# Altium PCB FPGA Board V1.PcbDoc (part 1 of 3)
Units mil, origin at the board's own origin, x right, y up, seen from the top; angles counter-clockwise.
Board outline 3460 x 2420 mil, 8 copper layers (Layer 1, Layer 2, Layer 3, Layer 4, Layer 5, Layer 6, Layer 7, Layer 8), stack 40.159 mil thick; 81 components, 311 nets, 1100 pads, 152 vias.
Unrouted connection lines stored in the file: 594.
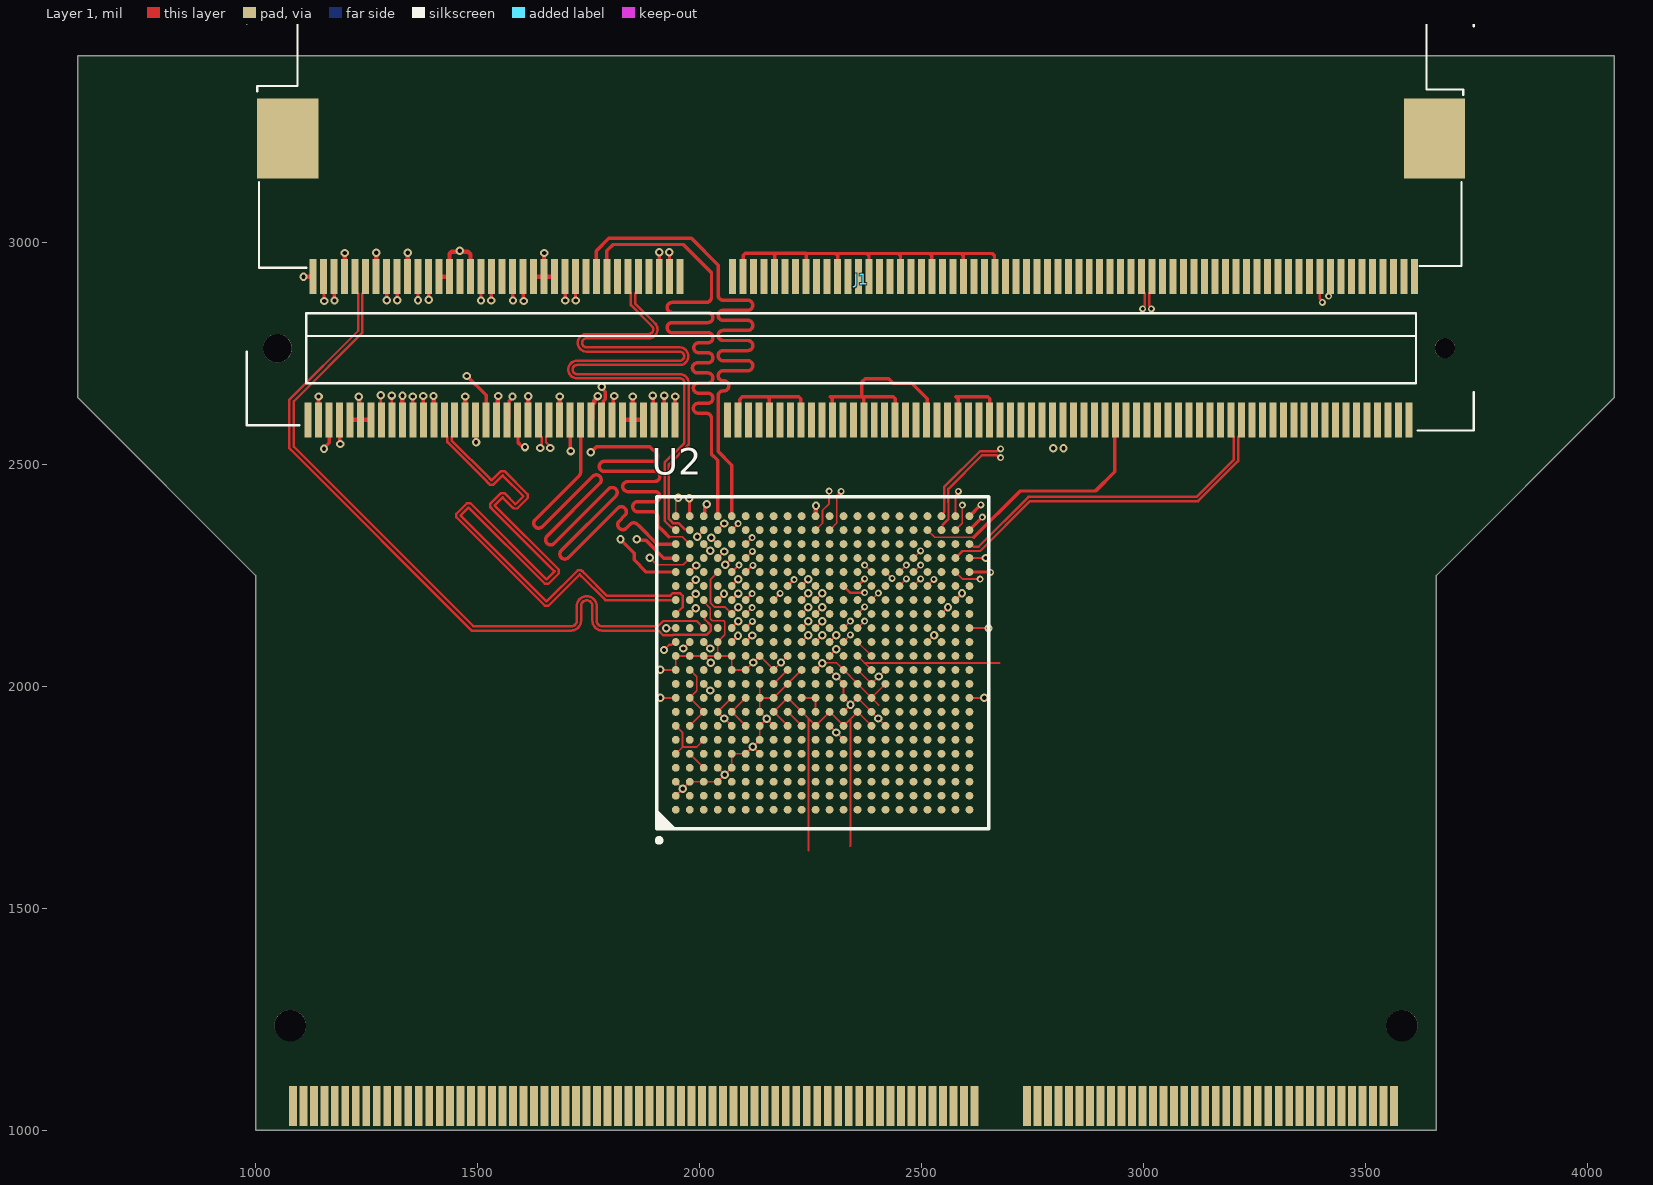
[diagram p0: Layer 1 view]
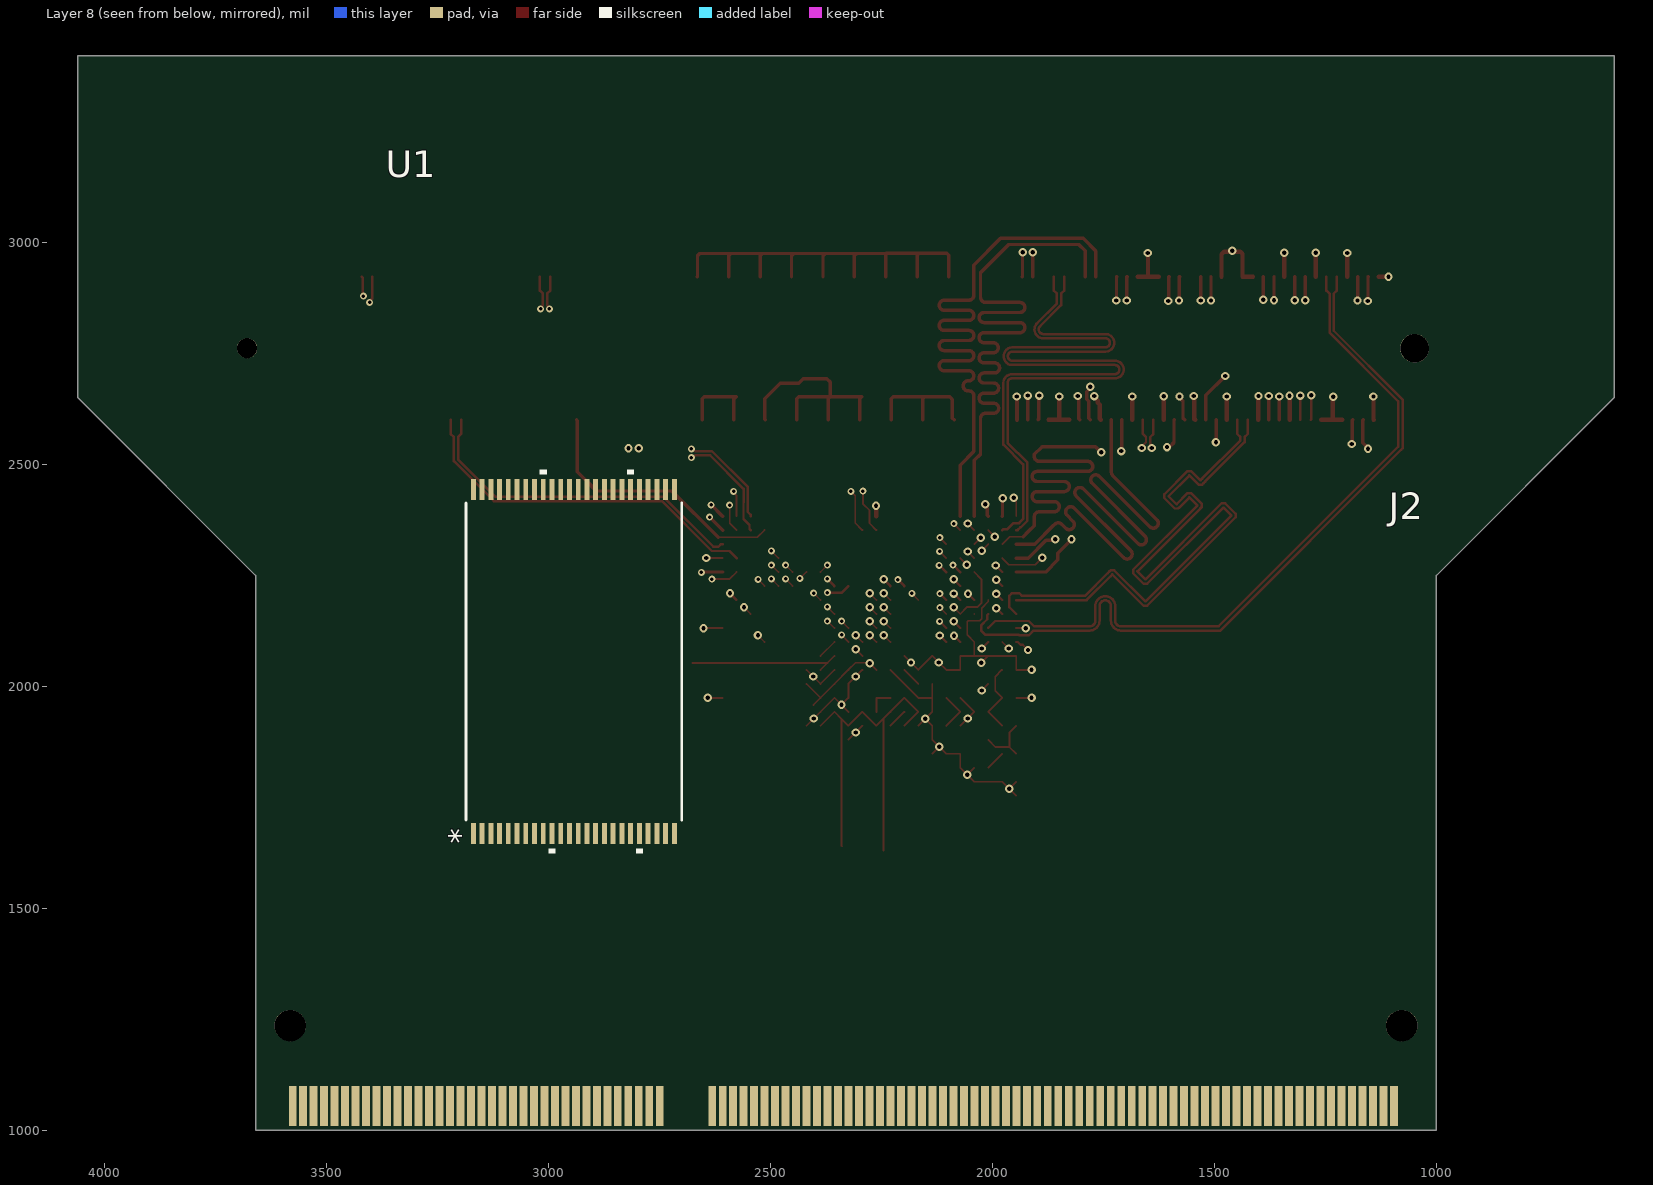
[diagram p1: Layer 8 view, seen from below]
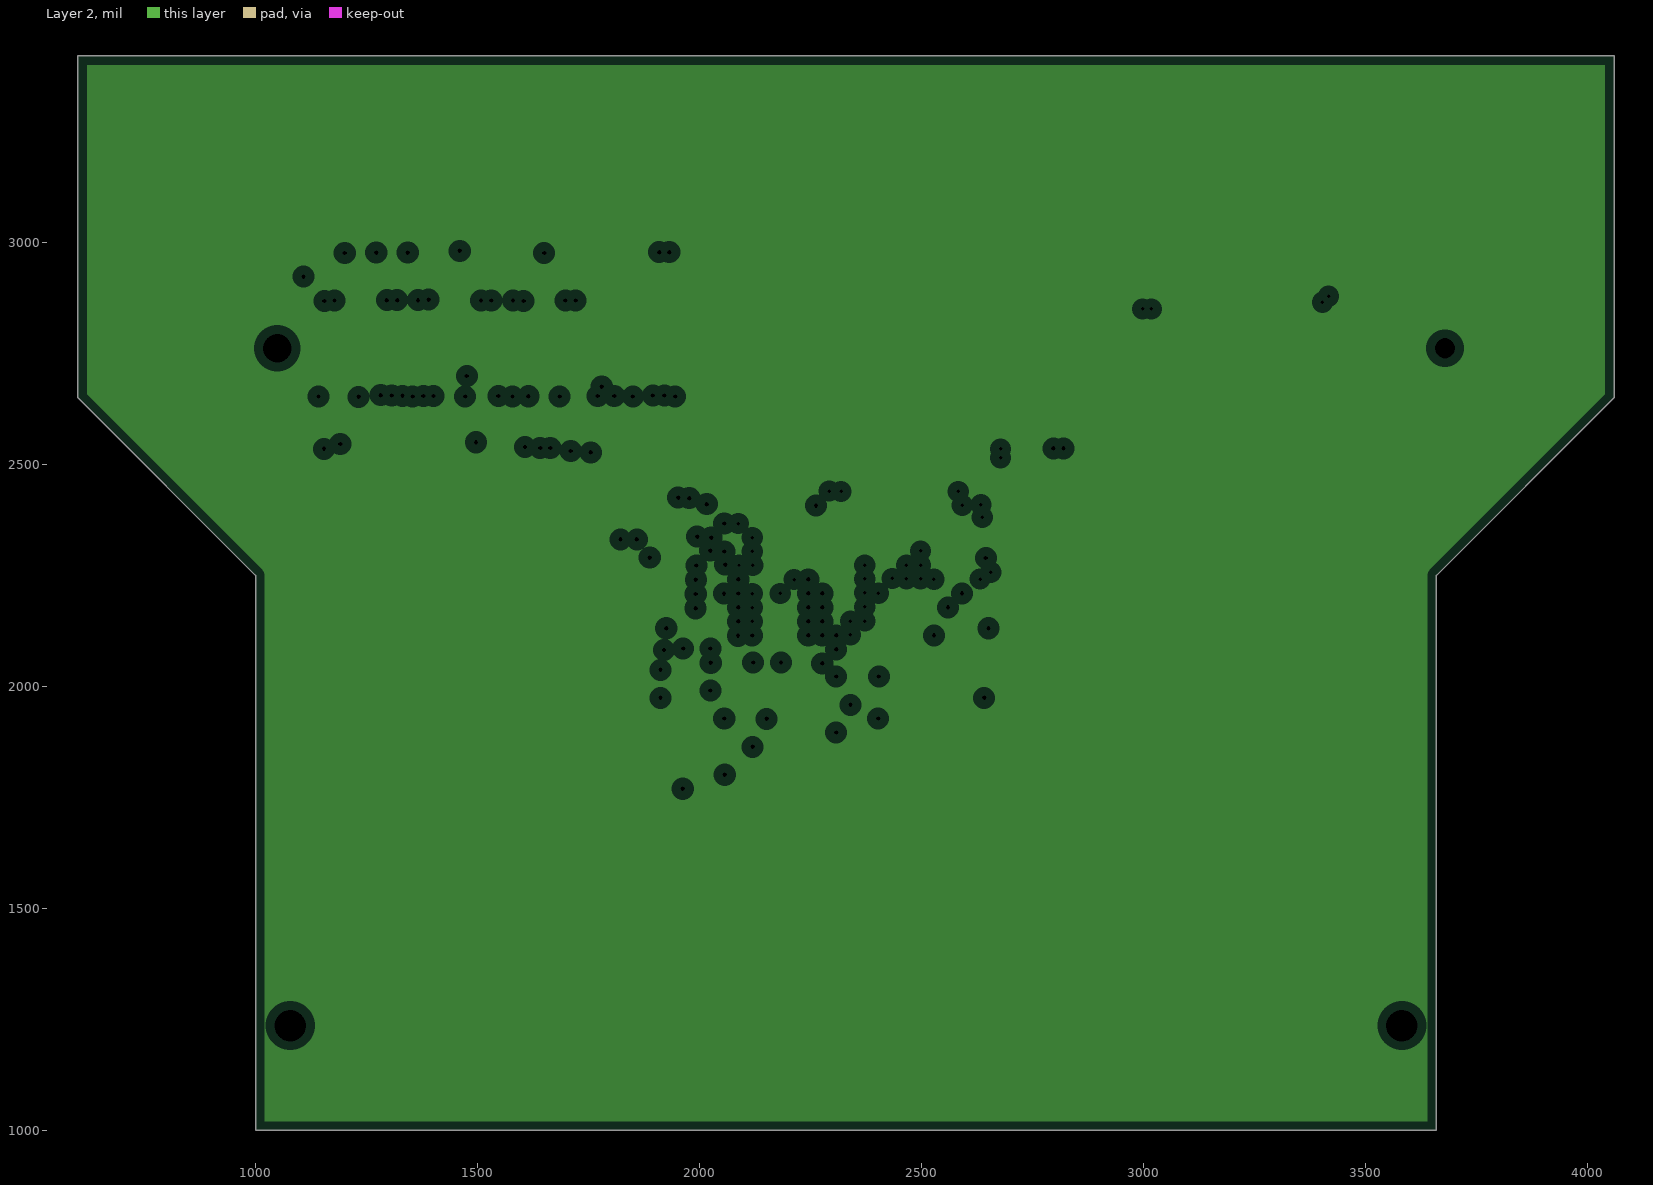
[diagram p2: Layer 2, clearances drawn from the general rule]
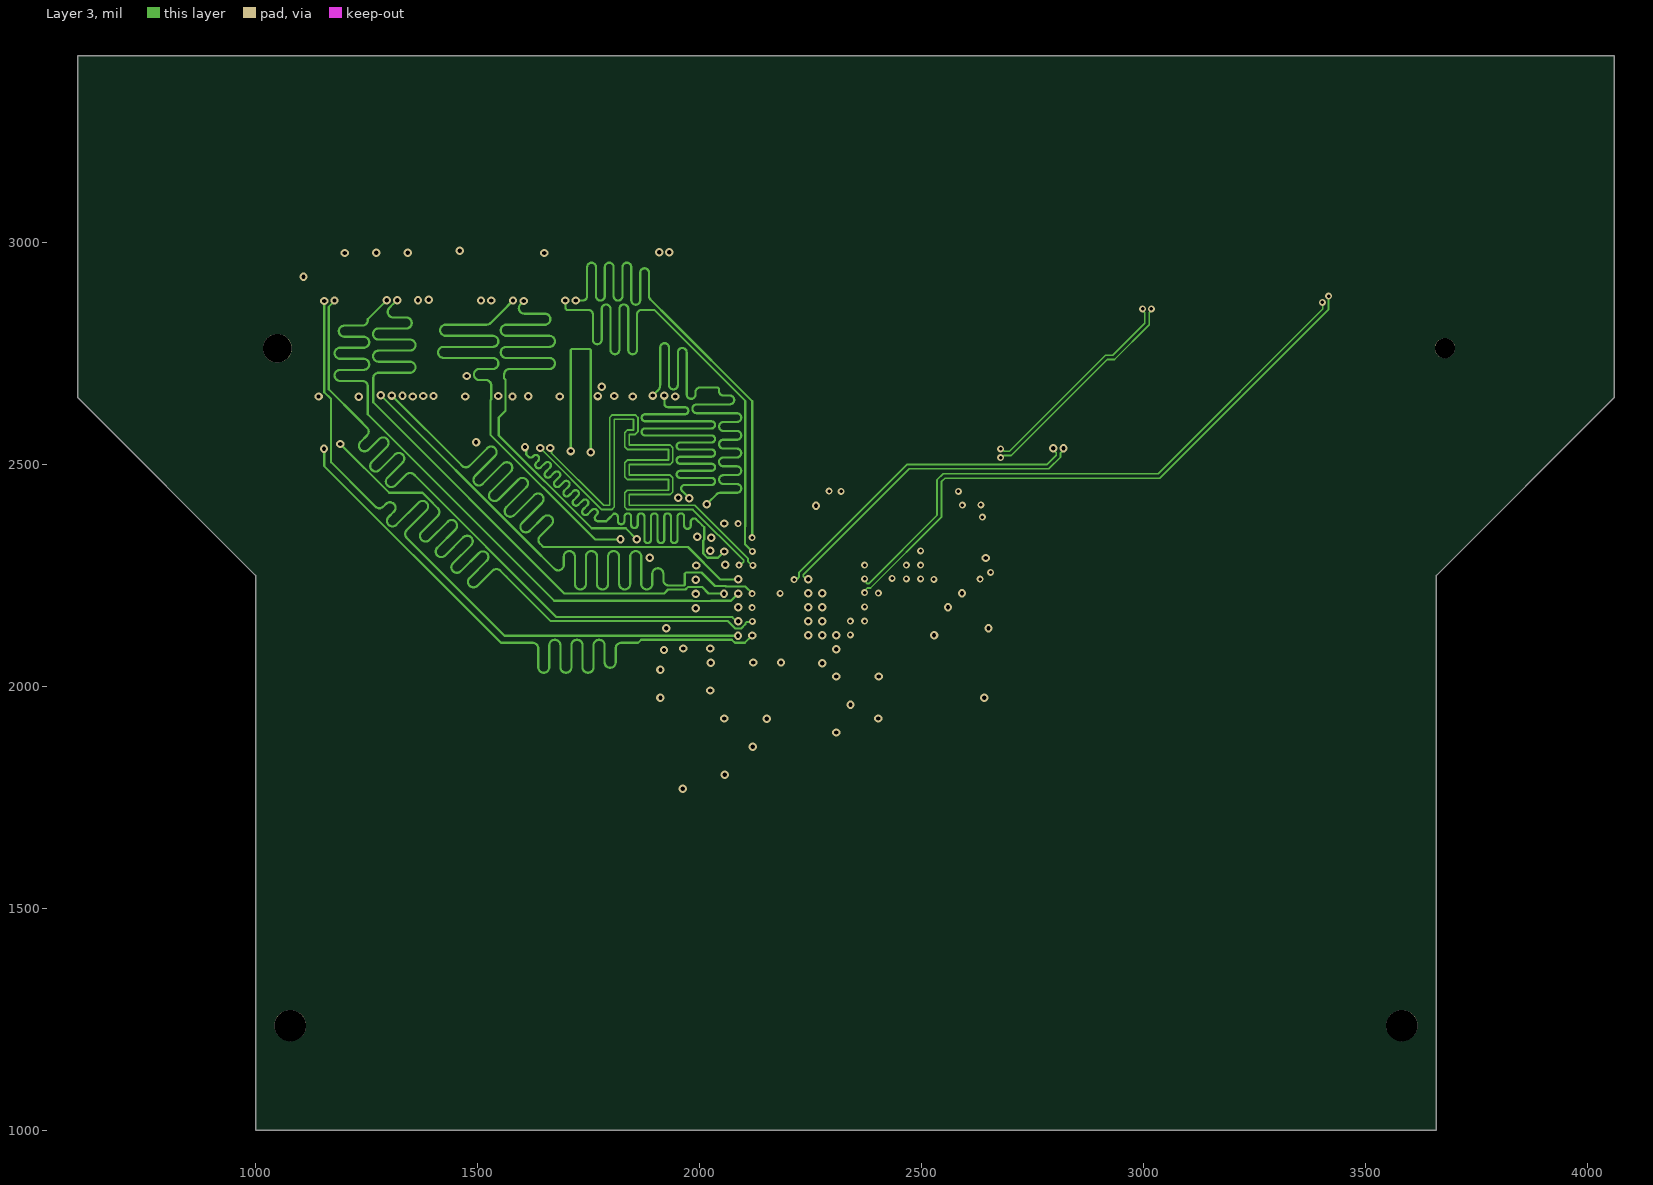
[diagram p3: Layer 3]
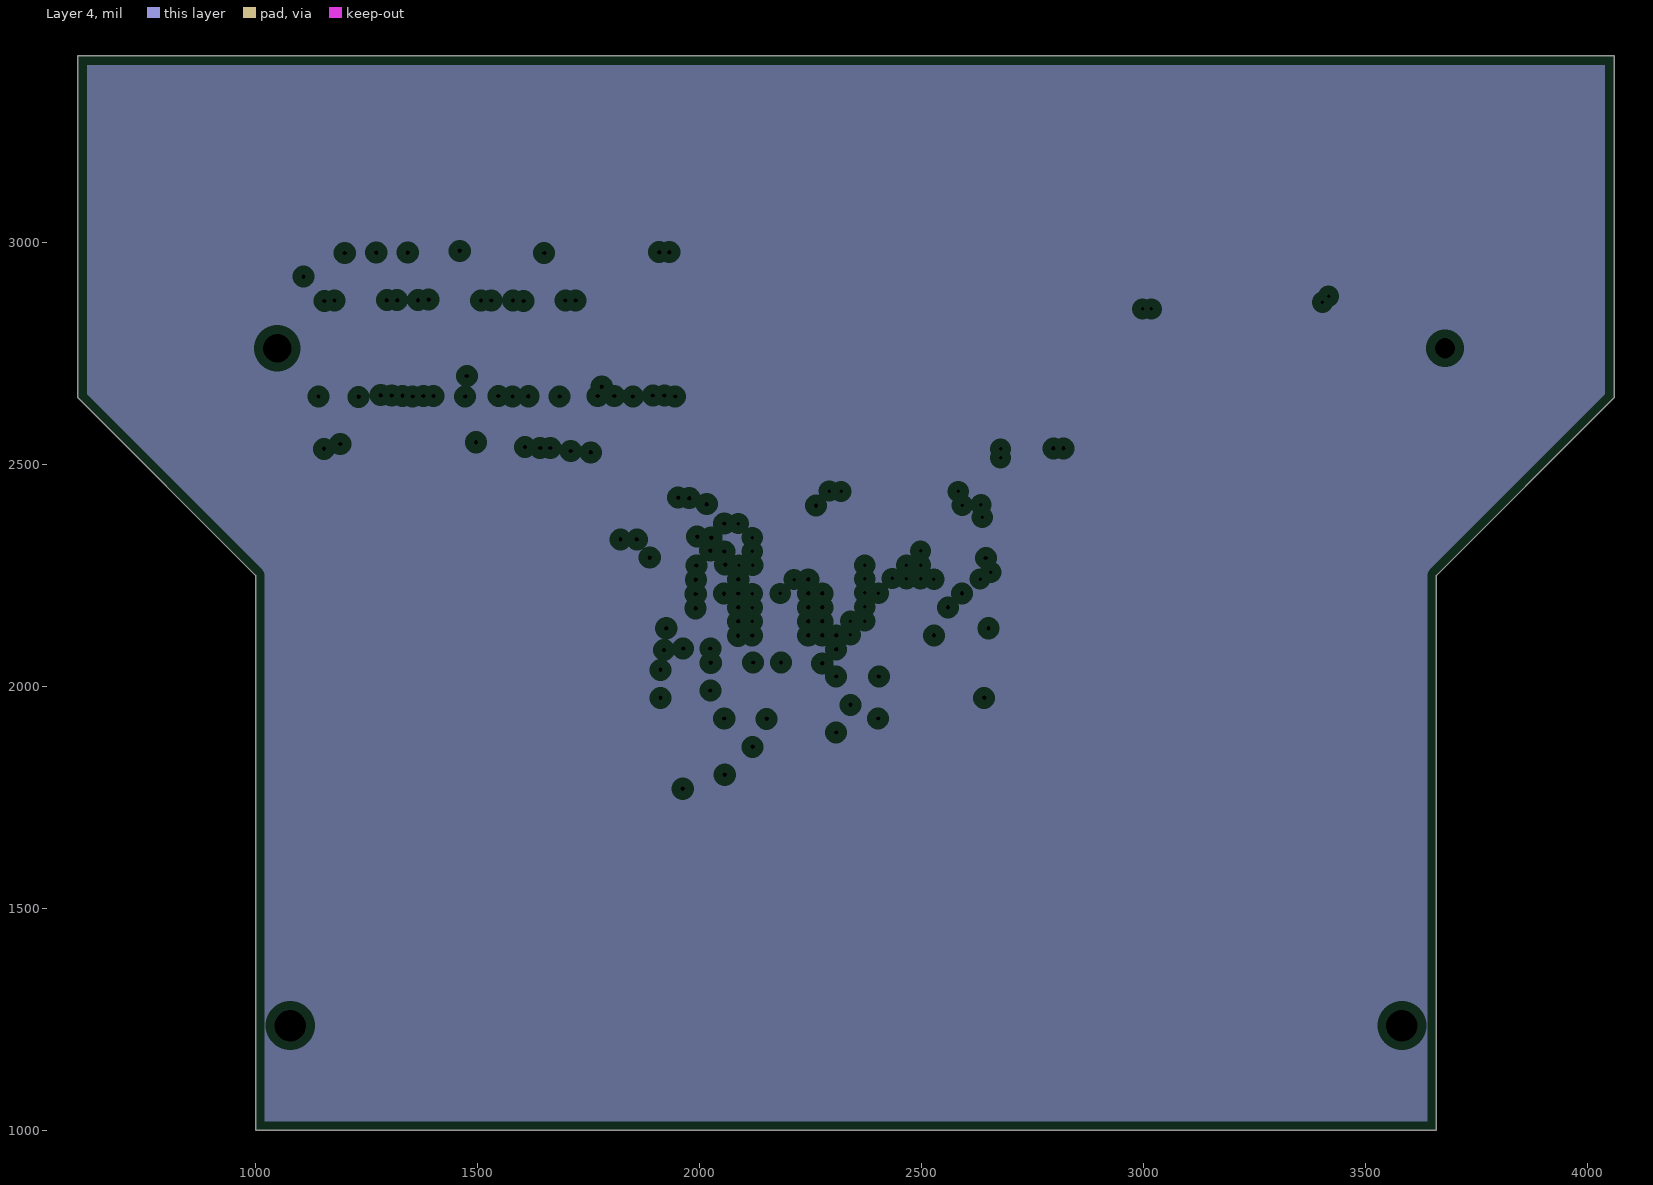
[diagram p4: Layer 4, clearances drawn from the general rule]
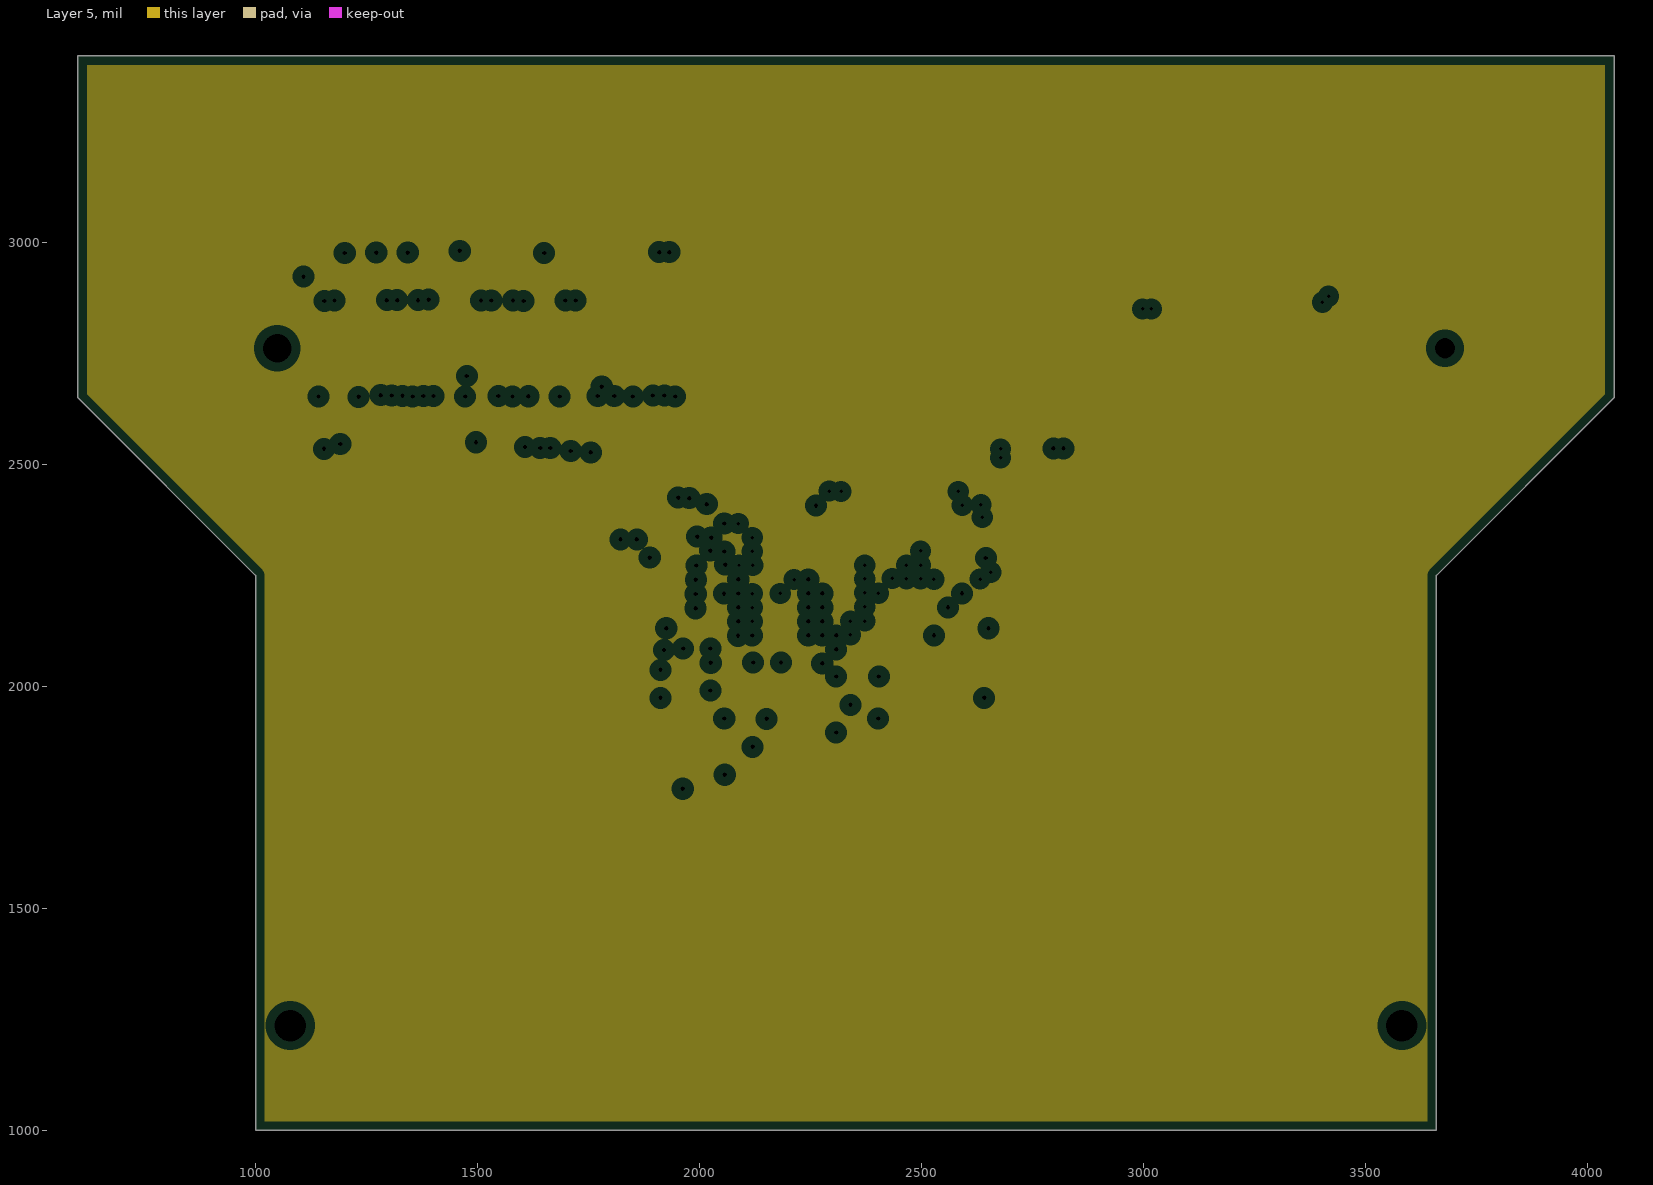
[diagram p5: Layer 5, clearances drawn from the general rule]
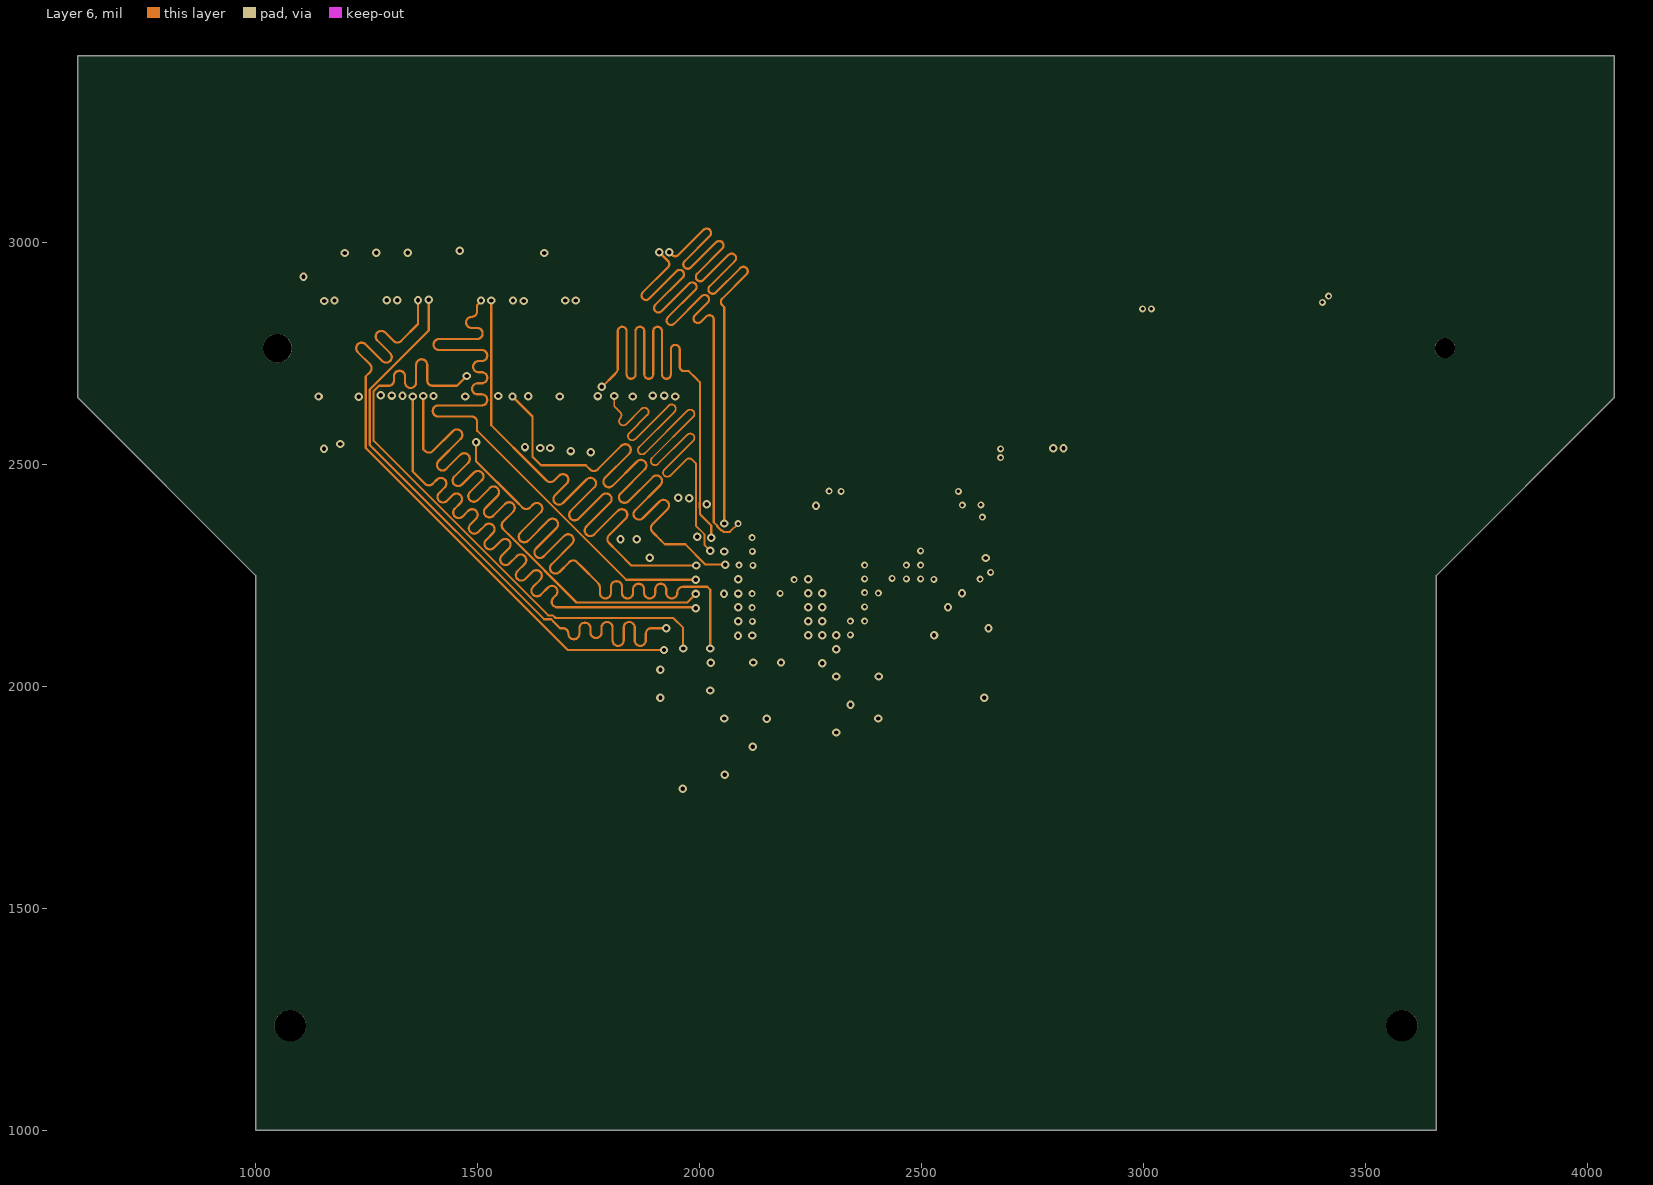
[diagram p6: Layer 6]
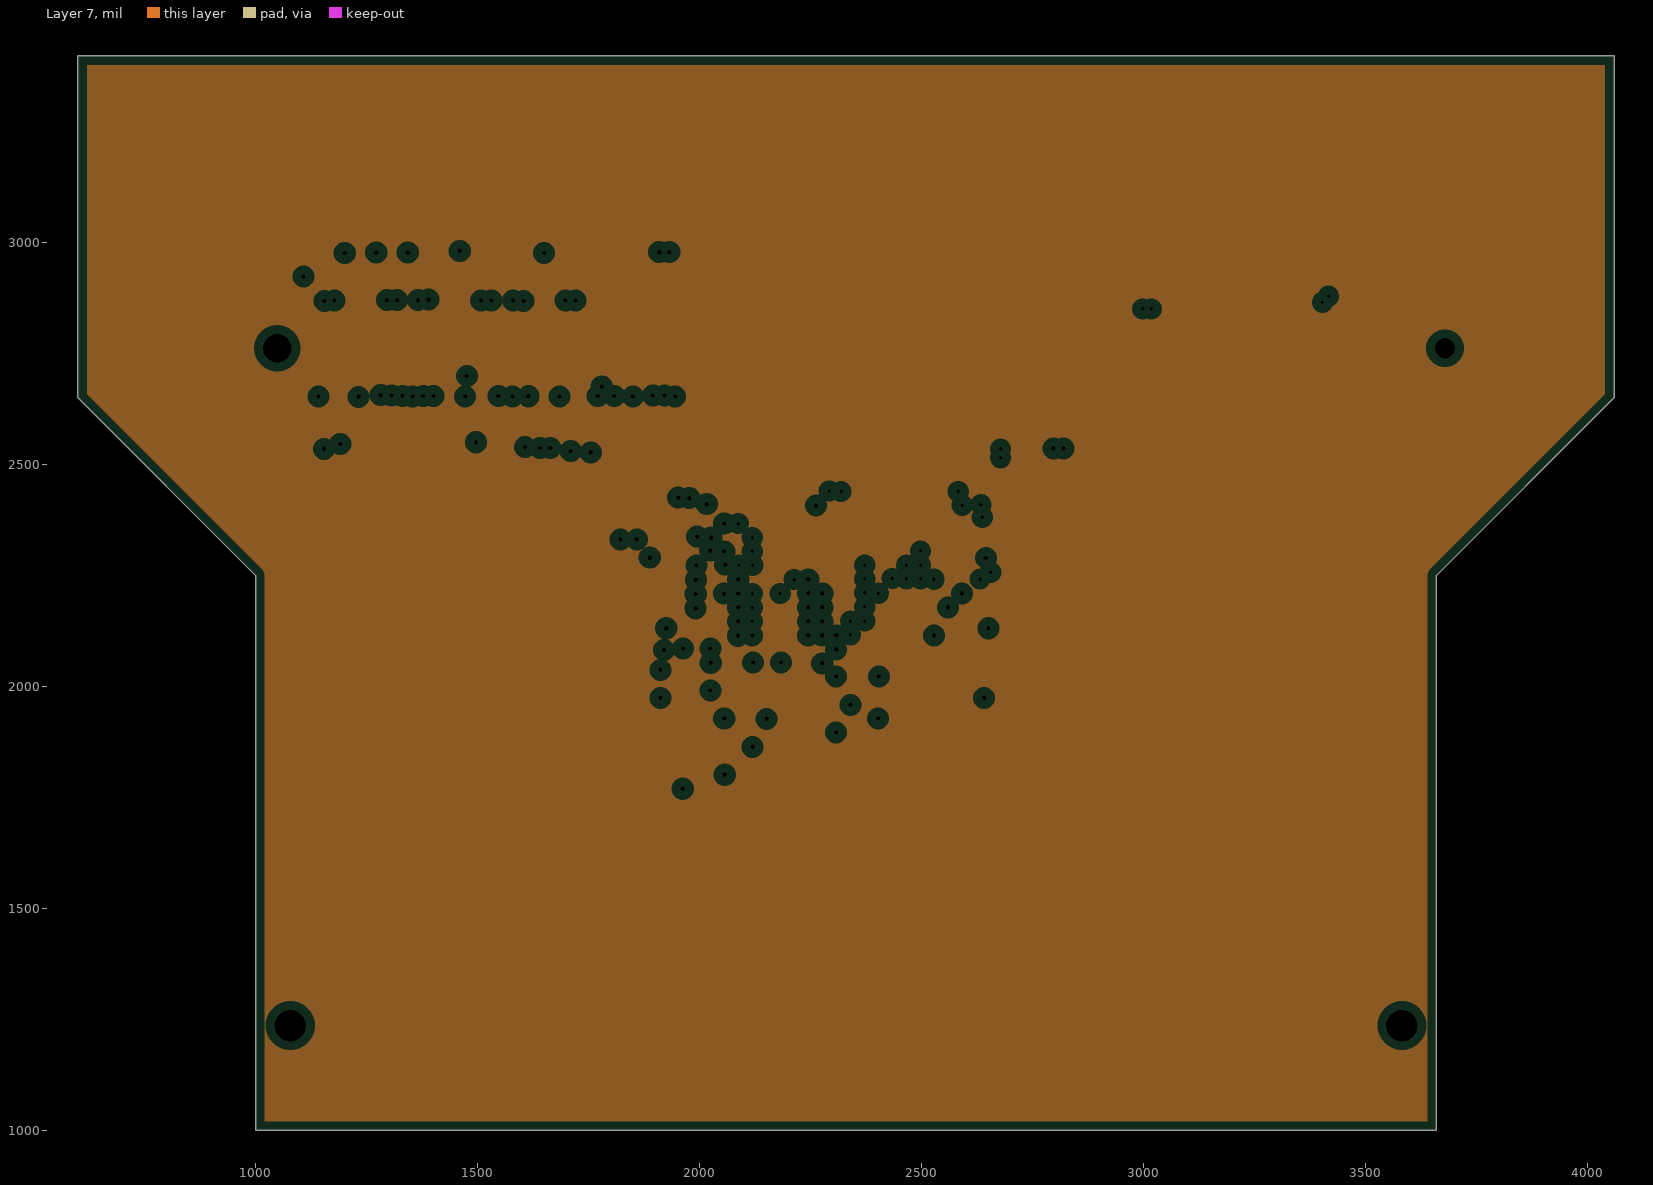
[diagram p7: Layer 7, clearances drawn from the general rule]

## Layer stack, top to bottom
Top Solder: solder mask 0.4, Solder Resist, Dk 3.5
Layer 1: signal copper 1.378
Dielectric 4: prepreg 3.15, PP-006, Dk 4.29
Layer 2: plane copper 1.378, net GND
Dielectric 2: core 3.937, FR-4, Dk 4.29
Layer 3: signal copper 1.378
Dielectric 6: prepreg 5.512, PP-006, Dk 4.29
Layer 4: plane copper 1.378
Dielectric 1: core 3.937, PP-006, Dk 4.29
Layer 5: plane copper 1.378
Dielectric 7: prepreg 5.512, PP-006, Dk 4.29
Layer 6: signal copper 1.378
Dielectric 3: core 3.937, FR-4, Dk 4.29
Layer 7: plane copper 1.378
Dielectric 5: prepreg 3.15, PP-006, Dk 4.29
Layer 8: signal copper 1.378
Bottom Solder: solder mask 0.4, Solder Resist, Dk 3.5

## Board outline
1000,2250 600,2650 600,3420 4060,3420 4060,2650 3660,2250 3660,1000 1000,1000

## Design rules (kind name [scope] priority, off if disabled: settings)
Clearance [All] p1: gap=4 ignorepadtopadclearanceinfootprint=FALSE
ComponentClearance [All] p1: gap=10 collisioncheckmode=3 verticalgap=10 showdistances=FALSE donotcheckwithout3dbody=TRUE
DiffPairsRouting CG [InDifferentialPair('CK0')] p1: maxlimit=5.9 minlimit=4 mostfreqgap=5.9 toplayer_maxgap=4 toplayer_prefgap=4 toplayer_minwidth=4 toplayer_maxwidth=5.54 toplayer_prefwidth=5.54 midlayer2_mingap=5.9 midlayer2_minwidth=4 midlayer2_maxwidth=4.01 midlayer2_prefwidth=4.01 midlayer3_mingap=5.9 midlayer3_minwidth=4 midlayer3_maxwidth=4.01 midlayer3_prefwidth=4.01 bottomlayer_maxgap=4 bottomlayer_prefgap=4 bottomlayer_minwidth=4 bottomlayer_maxwidth=5.54 bottomlayer_prefwidth=5.54 impedanceprofiledriven=TRUE impedanceprofileid={D4C1BE84-6531-4793-9445-CC9C55B29344} impedanceprofilevalue=80.000000 maxuncoupledlength=500
DiffPairsRouting DQS [InDifferentialPairClass('All Differential Pairs')] p2: maxlimit=5.88 minlimit=4 mostfreqgap=5.88 toplayer_maxgap=4 toplayer_prefgap=4 toplayer_minwidth=5.54 toplayer_maxwidth=5.54 toplayer_prefwidth=5.54 midlayer2_mingap=5.88 midlayer2_minwidth=4 midlayer2_maxwidth=4 midlayer2_prefwidth=4 midlayer3_mingap=5.88 midlayer3_minwidth=4 midlayer3_maxwidth=4 midlayer3_prefwidth=4 bottomlayer_maxgap=4 bottomlayer_prefgap=4 bottomlayer_minwidth=5.54 bottomlayer_maxwidth=5.54 bottomlayer_prefwidth=5.54 impedanceprofiledriven=TRUE impedanceprofileid={747DD5FD-BF27-4212-9AA4-2DDAB84F257A} impedanceprofilevalue=80.000000 maxuncoupledlength=500
Length [InNetClass('CG') Or InNetClass('DG_0') Or InNetClass('DG_1') Or InNetClass('DG_2') Or InNetClass('DG_3') Or InNetClass('DG_4') Or InNetClass('DG_5') Or InNetClass('DG_6') Or InNetClass('DG_7')] p1: maxlimit=4000 minlimit=1500
MatchedLengths "MatchedLengths CG" [InNetClass('CG')] p1: tolerance=4 checknetsindiffpair=FALSE checkdiffpairvsdiffpair=TRUE checkxsignals=TRUE checkothers=TRUE
MatchedLengths "MatchedLengths DG0" [InNetClass('DG_0')] p2: tolerance=4 checknetsindiffpair=FALSE checkdiffpairvsdiffpair=TRUE checkxsignals=TRUE checkothers=TRUE
MatchedLengths "MatchedLengths DG5" [InNetClass('DG_5')] p3: tolerance=4 checknetsindiffpair=FALSE checkdiffpairvsdiffpair=TRUE checkxsignals=TRUE checkothers=TRUE
MatchedLengths "MatchedLengths DG1" [InNetClass('DG_1')] p4: tolerance=4 checknetsindiffpair=FALSE checkdiffpairvsdiffpair=TRUE checkxsignals=TRUE checkothers=TRUE
MatchedLengths "MatchedLengths DG2" [InNetClass('DG_2')] p5: tolerance=4 checknetsindiffpair=FALSE checkdiffpairvsdiffpair=TRUE checkxsignals=TRUE checkothers=TRUE
MatchedLengths "MatchedLengths DG3" [InNetClass('DG_3')] p6: tolerance=4 checknetsindiffpair=FALSE checkdiffpairvsdiffpair=TRUE checkxsignals=TRUE checkothers=TRUE
MatchedLengths "MatchedLengths DG4" [InNetClass('DG_0')] p7: tolerance=4 checknetsindiffpair=FALSE checkdiffpairvsdiffpair=TRUE checkxsignals=TRUE checkothers=TRUE
MatchedLengths "MatchedLengths DG6" [InNetClass('DG_6')] p8: tolerance=4 checknetsindiffpair=FALSE checkdiffpairvsdiffpair=TRUE checkxsignals=TRUE checkothers=TRUE
MatchedLengths "MatchedLengths DG7" [InNetClass('DG_7')] p9: tolerance=4 checknetsindiffpair=FALSE checkdiffpairvsdiffpair=TRUE checkxsignals=TRUE checkothers=TRUE
MaxMinImpedance [InNetClass('CG')] p1: minimum=35.00 maximum=45.00
PlaneClearance [All] p1: clearance=20
PlaneConnect [All] p1: planeconnectstyle=Relief reliefexpansion=20 reliefentries=4 reliefconductorwidth=10 reliefairgap=10
PolygonConnect [All] p1: connectstyle=Relief reliefconductorwidth=10 reliefentries=4 polygonreliefangle="90 Angle" airgapwidth=10
RoutingVias [All] p1: holewidth=7.87 width=15.75 viastyle="Through Hole" minholewidth=7.87 minwidth=15.75 maxholewidth=28 maxwidth=50
SolderMaskExpansion [All] p1: expansion=4 istentingtop=FALSE
Width "Width DG0" [InNetClass('DG_0')] p1: maxlimit=7.7 minlimit=4 preferedwidth=7.7 midlayer2_maxwidth=4.92 midlayer2_prefwidth=4.92 midlayer3_maxwidth=4.92 midlayer3_prefwidth=4.92 impedanceprofiledriven=TRUE impedanceprofileid={962ABFC8-2729-48D3-94B5-690526E8E266} impedanceprofilevalue=40.000000 minimp=50.000000 maximp=50.000000 favimp=50.000000
Width "Width DG1" [InNetClass('DG_1')] p2: maxlimit=7.7 minlimit=4 preferedwidth=7.7 midlayer2_maxwidth=4.92 midlayer2_prefwidth=4.92 midlayer3_maxwidth=4.92 midlayer3_prefwidth=4.92 impedanceprofiledriven=TRUE impedanceprofileid={962ABFC8-2729-48D3-94B5-690526E8E266} impedanceprofilevalue=40.000000 minimp=50.000000 maximp=50.000000 favimp=50.000000
Width "Width DG2" [InNetClass('DG_2')] p3: maxlimit=7.7 minlimit=4 preferedwidth=7.7 midlayer2_maxwidth=4.92 midlayer2_prefwidth=4.92 midlayer3_maxwidth=4.92 midlayer3_prefwidth=4.92 impedanceprofiledriven=TRUE impedanceprofileid={962ABFC8-2729-48D3-94B5-690526E8E266} impedanceprofilevalue=40.000000 minimp=50.000000 maximp=50.000000 favimp=50.000000
Width "Width DG3" [InNetClass('DG_3')] p4: maxlimit=7.7 minlimit=4 preferedwidth=7.7 midlayer2_maxwidth=4.92 midlayer2_prefwidth=4.92 midlayer3_maxwidth=4.92 midlayer3_prefwidth=4.92 impedanceprofiledriven=TRUE impedanceprofileid={962ABFC8-2729-48D3-94B5-690526E8E266} impedanceprofilevalue=40.000000 minimp=50.000000 maximp=50.000000 favimp=50.000000
Width "Width DG4" [InNetClass('DG_4')] p5: maxlimit=7.7 minlimit=4 preferedwidth=7.7 midlayer2_maxwidth=4.92 midlayer2_prefwidth=4.92 midlayer3_maxwidth=4.92 midlayer3_prefwidth=4.92 impedanceprofiledriven=TRUE impedanceprofileid={962ABFC8-2729-48D3-94B5-690526E8E266} impedanceprofilevalue=40.000000 minimp=50.000000 maximp=50.000000 favimp=50.000000
Width "Width DG5" [InNetClass('DG_5')] p6: maxlimit=7.7 minlimit=4 preferedwidth=7.7 midlayer2_maxwidth=4.92 midlayer2_prefwidth=4.92 midlayer3_maxwidth=4.92 midlayer3_prefwidth=4.92 impedanceprofiledriven=TRUE impedanceprofileid={962ABFC8-2729-48D3-94B5-690526E8E266} impedanceprofilevalue=40.000000 minimp=50.000000 maximp=50.000000 favimp=50.000000
Width "Width DG6" [InNetClass('DG_6')] p7: maxlimit=7.7 minlimit=4 preferedwidth=7.7 midlayer2_maxwidth=4.92 midlayer2_prefwidth=4.92 midlayer3_maxwidth=4.92 midlayer3_prefwidth=4.92 impedanceprofiledriven=TRUE impedanceprofileid={962ABFC8-2729-48D3-94B5-690526E8E266} impedanceprofilevalue=40.000000 minimp=50.000000 maximp=50.000000 favimp=50.000000
Width "Width DG7" [InNetClass('DG_7')] p8: maxlimit=7.7 minlimit=4 preferedwidth=7.7 midlayer2_maxwidth=4.92 midlayer2_prefwidth=4.92 midlayer3_maxwidth=4.92 midlayer3_prefwidth=4.92 impedanceprofiledriven=TRUE impedanceprofileid={962ABFC8-2729-48D3-94B5-690526E8E266} impedanceprofilevalue=40.000000 minimp=50.000000 maximp=50.000000 favimp=50.000000
Width "Width CG" [InNetClass('CG')] p9: maxlimit=7.7 minlimit=4 preferedwidth=7.7 midlayer2_maxwidth=4.92 midlayer2_prefwidth=4.92 midlayer3_maxwidth=4.92 midlayer3_prefwidth=4.92 impedanceprofiledriven=TRUE impedanceprofileid={962ABFC8-2729-48D3-94B5-690526E8E266} impedanceprofilevalue=40.000000 minimp=50.000000 maximp=50.000000 favimp=50.000000
Width [All] p10: maxlimit=50 minlimit=4 preferedwidth=10
26 further rules are at their usual default settings.

## Classes and differential pairs
net class DG_7: DQ56 DQ57 DQ58 DQ59 DQ60 DQ61 DQ62 DQ63 DQS7_N DQS7_P
net class DG_6: DQ48 DQ49 DQ50 DQ51 DQ52 DQ53 DQ54 DQ55 DQS6_N DQS6_P
net class DG_5: DQ40 DQ41 DQ42 DQ43 DQ44 DQ45 DQ46 DQ47 DQS5_N DQS5_P
net class DG_4: DQ32 DQ33 DQ34 DQ35 DQ36 DQ37 DQ38 DQ39 DQS4_N DQS4_P
net class DG_3: DQ24 DQ25 DQ26 DQ27 DQ28 DQ29 DQ30 DQ31 DQS3_N DQS3_P
net class DG_2: DQ16 DQ17 DQ18 DQ19 DQ20 DQ21 DQ22 DQ23 DQS2_N DQS2_P
net class DG_1: DQ8 DQ9 DQ10 DQ11 DQ12 DQ13 DQ14 DQ15 DQS1_N DQS1_P
net class DG_0: DQ0 DQ1 DQ2 DQ3 DQ4 DQ5 DQ6 DQ7 DQS0_N DQS0_P
net class CG: A0 A1 A2 A3 A4 A5 A6 A7 A8 A9 A10 A11 A12 A13 A14 A15 CAS CK0_N CK0_P CKE0 CS0 ODT0 RAS RESET WE
net class SWL[4..0]: GPIO24 GPIO25 GPIO26 GPIO27 GPIO28
net class SWH[5..0]: GPIO29 GPIO30 GPIO31 GPIO32 GPIO33 GPIO34
net class R[7..0]: GPIO0 GPIO1 GPIO2 GPIO3 GPIO4 GPIO5 GPIO6 GPIO7
net class LSG[2..0]: GPIO35 GPIO36 GPIO37
net class HSG[3..0]: GPIO38 GPIO39 GPIO40 GPIO41
net class GPIO[0..118]: B0 B1 B2 B3 B4 B5 B6 B7 G0 G1 G2 G3 G4 G5 G6 G7 GPIO0 GPIO1 GPIO2 GPIO3 GPIO4 GPIO5 GPIO6 GPIO7 GPIO24 GPIO25 GPIO26 GPIO27 GPIO28 GPIO29 GPIO30 GPIO31 GPIO32 GPIO33 GPIO34 GPIO35 GPIO36 GPIO37 GPIO38 GPIO39 GPIO40 GPIO41 GPIO42 GPIO43 GPIO44 GPIO45 GPIO46 GPIO47 GPIO48 GPIO49 GPIO50 GPIO51 GPIO52 GPIO53 GPIO54 GPIO55 GPIO56 GPIO57 GPIO58 GPIO59 GPIO60 GPIO61 GPIO62 GPIO63 GPIO64 GPIO65 GPIO66 GPIO67 GPIO68 GPIO69 GPIO70 GPIO71 GPIO72 GPIO73 GPIO74 GPIO75 GPIO76 GPIO77 GPIO78 GPIO79 GPIO80 GPIO81 GPIO82 GPIO83 GPIO84 GPIO85 GPIO86 GPIO87 GPIO88 GPIO89 GPIO90 GPIO91 GPIO92 GPIO93 GPIO94 GPIO95 GPIO96 GPIO97 GPIO98 GPIO99 GPIO100 GPIO101 GPIO102 GPIO103 GPIO104 GPIO105 GPIO106 GPIO107 GPIO108 GPIO109 GPIO110 GPIO111 GPIO112 GPIO113 GPIO114 GPIO115 GPIO116 GPIO117 GPIO118
net class G[7..0]: G0 G1 G2 G3 G4 G5 G6 G7
net class EIO[0..35]: EIO0 EIO1 EIO2 EIO3 EIO4 EIO5 EIO6 EIO7 EIO8 EIO9 EIO10 EIO11 EIO12 EIO13 EIO14 EIO15 EIO16 EIO17 EIO18 EIO19 EIO20 EIO21 EIO22 EIO23 EIO24 EIO25 EIO26 EIO27 EIO28 EIO29 EIO30 EIO31 EIO32 EIO33 EIO34 EIO35
net class DQ[63..0]: DQ0 DQ1 DQ2 DQ3 DQ4 DQ5 DQ6 DQ7 DQ8 DQ9 DQ10 DQ11 DQ12 DQ13 DQ14 DQ15 DQ16 DQ17 DQ18 DQ19 DQ20 DQ21 DQ22 DQ23 DQ24 DQ25 DQ26 DQ27 DQ28 DQ29 DQ30 DQ31 DQ32 DQ33 DQ34 DQ35 DQ36 DQ37 DQ38 DQ39 DQ40 DQ41 DQ42 DQ43 DQ44 DQ45 DQ46 DQ47 DQ48 DQ49 DQ50 DQ51 DQ52 DQ53 DQ54 DQ55 DQ56 DQ57 DQ58 DQ59 DQ60 DQ61 DQ62 DQ63
net class BA[2..0]: BA0 BA1 BA2
net class B[7..0]: B0 B1 B2 B3 B4 B5 B6 B7
net class A[15..0]: A0 A1 A2 A3 A4 A5 A6 A7 A8 A9 A10 A11 A12 A13 A14 A15
component class "SODIMM Motherboard Connector": J2
component class "RAM (DDR3L)": C41 C42 C43 C44 C45 C46 C47 C48 C49 C50 C51 C52 C53 C54 C55 C56 C57 C58 C59 C60 C61 C62 J1
component class "FPGA Board Top": P1 P2 P3 P4 P5 Q1 TP1 TP2 TP3 TP4 TP5 TP6 TP7 TP8 TP9
component class "A200T FPGA": C1 C2 C3 C4 C5 C6 C7 C8 C9 C10 C11 C12 C13 C14 C15 C16 C17 C18 C19 C20 C21 C22 C23 C24 C25 C26 C27 C28 C29 C30 C31 C32 C33 C34 C35 C36 C37 C38 C39 C40 U1 U2
differential pair DQS7: +DQS7_P -DQS7_N
differential pair DQS6: +DQS6_P -DQS6_N
differential pair DQS5: +DQS5_P -DQS5_N
differential pair DQS4: +DQS4_P -DQS4_N
differential pair DQS3: +DQS3_P -DQS3_N
differential pair DQS2: +DQS2_P -DQS2_N
differential pair DQS1: +DQS1_P -DQS1_N
differential pair DQS0: +DQS0_P -DQS0_N
differential pair CK0: +CK0_P -CK0_N

## Components (designator, comment, footprint, x,y, rotation, side; value= is the part's Value field where it differs from the comment)
C1 "0.47µF" "CAP 0603_1608" 8412.5,4430 r0 top
C2 "0.47µF" "CAP 0603_1608" 8582.5,4430 r0 top
C3 "0.47µF" "CAP 0603_1608" 8752.5,4430 r0 top
C4 "0.47µF" "CAP 0603_1608" 8922.5,4430 r0 top
C5 "4.7µF" "CAP 0603_1608" 9092.5,4430 r0 top
C6 "47µF" "CAP 0805_2012" 9272.5,4425 r0 top
C7 "0.47µF" "CAP 0603_1608" 912.5,4430 r0 top
C8 "47µF" "CAP 0805_2012" 1092.5,4425 r0 top
C9 "0.47µF" "CAP 0603_1608" 1272.5,4430 r0 top
C10 "0.47µF" "CAP 0603_1608" 1412.5,4405 r90 top
C11 "0.47µF" "CAP 0603_1608" 1662.5,4430 r0 top
C12 "47µF" "CAP 0805_2012" 1872.5,4425 r0 top
C13 "47µF" "CAP 0805_2012" 2092.5,4425 r0 top
C14 "47µF" "CAP 0805_2012" 2312.5,4425 r0 top
C15 "47µF" "CAP 0805_2012" 2532.5,4425 r0 top
C16 "0.47µF" "CAP 0603_1608" 2717.5,4405 r90 top
C17 "47µF" "CAP 0805_2012" 2972.5,4425 r0 top
C18 "0.47µF" "CAP 0603_1608" 3157.5,4405 r90 top
C19 "0.47µF" "CAP 0603_1608" 3377.5,4405 r90 top
C20 "0.47µF" "CAP 0603_1608" 3597.5,4405 r90 top
C21 "47µF" "CAP 0805_2012" 3867.5,4425 r0 top
C22 "47µF" "CAP 0805_2012" 4042.5,4395 r90 top
C23 "47µF" "CAP 0805_2012" 4272.5,4395 r90 top
C24 "47µF" "CAP 0805_2012" 4502.5,4395 r90 top
C25 "0.47µF" "CAP 0603_1608" 4727.5,4405 r90 top
C26 "47µF" "CAP 0805_2012" 4962.5,4395 r90 top
C27 "0.47µF" "CAP 0603_1608" 5187.5,4405 r90 top
C28 "0.47µF" "CAP 0603_1608" 5417.5,4405 r90 top
C29 "0.47µF" "CAP 0603_1608" 5647.5,4405 r90 top
C30 "47µF" "CAP 0805_2012" 5882.5,4395 r90 top
C31 "47µF" "CAP 0805_2012" 6147.5,4425 r0 top
C32 "47µF" "CAP 0805_2012" 6322.5,4395 r90 top
C33 "47µF" "CAP 0805_2012" 6552.5,4395 r90 top
C34 "0.47µF" "CAP 0603_1608" 6777.5,4405 r90 top
C35 "0.47µF" "CAP 0603_1608" 7007.5,4405 r90 top
C36 "0.47µF" "CAP 0603_1608" 7237.5,4405 r90 top
C37 "47µF" "CAP 0805_2012" 7472.5,4395 r90 top
C38 "47µF" "CAP 0805_2012" 7702.5,4395 r90 top
C39 "47µF" "CAP 0805_2012" 7932.5,4395 r90 top
C40 "47µF" "CAP 0805_2012" 8162.5,4395 r90 top
C41 "0.47µF" "CAP 0603_1608" 5415,3890 r0 top
C42 "47µF" "CAP 0805_2012" 5605,3855 r90 top
C43 "0.47µF" "CAP 0603_1608" 4930,3865 r90 top
C44 "47µF" "CAP 0805_2012" 5165,3855 r90 top
C45 "0.47µF" "CAP 0603_1608" 4470,3865 r90 top
C46 "47µF" "CAP 0805_2012" 4705,3855 r90 top
C47 "0.47µF" "CAP 0603_1608" 4010,3865 r90 top
C48 "47µF" "CAP 0805_2012" 4245,3855 r90 top
C49 "0.47µF" "CAP 0603_1608" 3550,3865 r90 top
C50 "0.47µF" "CAP 0603_1608" 3780,3865 r90 top
C51 "0.47µF" "CAP 0603_1608" 3135,3890 r0 top
C52 "0.47µF" "CAP 0603_1608" 3320,3865 r90 top
C53 "0.47µF" "CAP 0603_1608" 830,3865 r90 top
C54 "0.47µF" "CAP 0603_1608" 1060,3865 r90 top
C55 "0.47µF" "CAP 0603_1608" 1290,3865 r90 top
C56 "0.47µF" "CAP 0603_1608" 1520,3865 r90 top
C57 "0.47µF" "CAP 0603_1608" 1750,3865 r90 top
C58 "0.47µF" "CAP 0603_1608" 1980,3865 r90 top
C59 "0.47µF" "CAP 0603_1608" 2210,3865 r90 top
C60 "0.47µF" "CAP 0603_1608" 2440,3865 r90 top
C61 "47µF" "CAP 0805_2012" 2705,3885 r0 top
C62 "47µF" "CAP 0805_2012" 2885,3855 r90 top
J1 "2013289-1" TE_2013289-1 2362.13,2761.58 r0 top locked
J2 "2013289-1" "DDR3 SODIMM Gold Finger" 3660.91,999.88 r180 bottom
P1 "Header 3" HDR1X3 907.5,4780 r90 top
P2 "Header 3" HDR1X3 1067.5,4780 r90 top
P3 "Header 3" HDR1X3 1237.5,4780 r90 top
P4 "Header 4" HDR1X4 737.5,4680 r90 top
P5 "Header 4" HDR1X4 2097.5,4680 r90 top
Q1 "SiT8008 Oscillator" "SiT8008 2.5x2" 97.5,4970 r0 top
TP1 "5019" KSTN-5019_V 2982.5,4990 r0 top
TP2 "5019" KSTN-5019_V 2752.5,4990 r0 top
TP3 "5019" KSTN-5019_V 2522.5,4990 r0 top
TP4 "5019" KSTN-5019_V 2292.5,4990 r0 top
TP5 "5019" KSTN-5019_V 1892.5,4990 r0 top
TP6 "5019" KSTN-5019_V 1662.5,4990 r0 top
TP7 "5019" KSTN-5019_V 1432.5,4990 r0 top
TP8 "5019" KSTN-5019_V 532.5,4990 r0 top
TP9 "5019" KSTN-5019_V 302.5,4990 r0 top
U1 "S34ML02G200TFA000" TSOP-48_TSOP1_SPA 2943,2056 r90 bottom
U2 "XC7A200T-1SBG484C" SBG484 2277.27,2052.79 r90 top locked

## Footprints (in the part's own frame and the unit in brackets; to place one, negate y for a bottom-side part, rotate by r counter-clockwise, add the part's x,y. Pads: shape width x height; smd on the part's side, far side on the other; paste and mask are expansions set on the pad)
"CAP 0603_1608" [mm] "Chip Capacitor, 2-Leads, Body 1.60x0.80mm, IPC Medium Density"
  rect 0.9x1 smd: 1(-0.675,0) 2(0.675,0)
  silkscreen extent -1.4,-0.7 1.4,0.7, body extent -0.8,-0.41 0.8,0.41, height 0.82
"CAP 0805_2012" [mm] "Chip Capacitor, 2-Leads, Body 2.00x1.20mm, IPC Medium Density"
  rect 1.3x1.4 smd: 1(-0.8,0) 2(0.8,0)
  silkscreen extent -1.7,-0.9 1.7,0.9, body extent -1,-0.64 1,0.64, height 1.26
"DDR3 SODIMM Gold Finger" [mm]
  rect 0.45x2.3 smd mask+0: 1(2.15,1.4) 3(2.75,1.4) 5(3.35,1.4) 7(3.95,1.4) 9(4.55,1.4) 11(5.15,1.4) 13(5.75,1.4) 15(6.35,1.4) 17(6.95,1.4) 19(7.55,1.4) 21(8.15,1.4) 23(8.75,1.4) 25(9.35,1.4) 27(9.95,1.4) 29(10.55,1.4) 31(11.15,1.4) 33(11.75,1.4) 35(12.35,1.4) 37(12.95,1.4) 39(13.55,1.4) 41(14.15,1.4) 43(14.75,1.4) 45(15.35,1.4) 47(15.95,1.4) 49(16.55,1.4) 51(17.15,1.4) 53(17.75,1.4) 55(18.35,1.4) 57(18.95,1.4) 59(19.55,1.4) 61(20.15,1.4) 63(20.75,1.4) 65(21.35,1.4) 67(21.95,1.4) 69(22.55,1.4) 71(23.15,1.4) 73(26.15,1.4) 75(26.75,1.4) 77(27.35,1.4) 79(27.95,1.4) 81(28.55,1.4) 83(29.15,1.4) 85(29.75,1.4) 87(30.35,1.4) 89(30.95,1.4) 91(31.55,1.4) 93(32.15,1.4) 95(32.75,1.4) 97(33.35,1.4) 99(33.95,1.4) 101(34.55,1.4) 103(35.15,1.4) 105(35.75,1.4) 107(36.35,1.4) 109(36.95,1.4) 111(37.55,1.4) 113(38.15,1.4) 115(38.75,1.4) 117(39.35,1.4) 119(39.95,1.4) 121(40.55,1.4) 123(41.15,1.4) 125(41.75,1.4) 127(42.35,1.4) 129(42.95,1.4) 131(43.55,1.4) 133(44.15,1.4) 135(44.75,1.4) 137(45.35,1.4) 139(45.95,1.4) 141(46.55,1.4) 143(47.15,1.4) 145(47.75,1.4) 147(48.35,1.4) 149(48.95,1.4) 151(49.55,1.4) 153(50.15,1.4) 155(50.75,1.4) 157(51.35,1.4) 159(51.95,1.4) 161(52.55,1.4) 163(53.15,1.4) 165(53.75,1.4) 167(54.35,1.4) 169(54.95,1.4) 171(55.55,1.4) 173(56.15,1.4) 175(56.75,1.4) 177(57.35,1.4) 179(57.95,1.4) 181(58.55,1.4) 183(59.15,1.4) 185(59.75,1.4) 187(60.35,1.4) 189(60.95,1.4) 191(61.55,1.4) 193(62.15,1.4) 195(62.75,1.4) 197(63.35,1.4) 199(63.95,1.4) 201(64.55,1.4) 203(65.15,1.4)
  rect 0.45x2.3 smd far side mask+0: 2(2.45,1.4) 4(3.05,1.4) 6(3.65,1.4) 8(4.25,1.4) 10(4.85,1.4) 12(5.45,1.4) 14(6.05,1.4) 16(6.65,1.4) 18(7.25,1.4) 20(7.85,1.4) 22(8.45,1.4) 24(9.05,1.4) 26(9.65,1.4) 28(10.25,1.4) 30(10.85,1.4) 32(11.45,1.4) 34(12.05,1.4) 36(12.65,1.4) 38(13.25,1.4) 40(13.85,1.4) 42(14.45,1.4) 44(15.05,1.4) 46(15.65,1.4) 48(16.25,1.4) 50(16.85,1.4) 52(17.45,1.4) 54(18.05,1.4) 56(18.65,1.4) 58(19.25,1.4) 60(19.85,1.4) 62(20.45,1.4) 64(21.05,1.4) 66(21.65,1.4) 68(22.25,1.4) 70(22.85,1.4) 72(23.45,1.4) 74(26.45,1.4) 76(27.05,1.4) 78(27.65,1.4) 80(28.25,1.4) 82(28.85,1.4) 84(29.45,1.4) 86(30.05,1.4) 88(30.65,1.4) 90(31.25,1.4) 92(31.85,1.4) 94(32.45,1.4) 96(33.05,1.4) 98(33.65,1.4) 100(34.25,1.4) 102(34.85,1.4) 104(35.45,1.4) 106(36.05,1.4) 108(36.65,1.4) 110(37.25,1.4) 112(37.85,1.4) 114(38.45,1.4) 116(39.05,1.4) 118(39.65,1.4) 120(40.25,1.4) 122(40.85,1.4) 124(41.45,1.4) 126(42.05,1.4) 128(42.65,1.4) 130(43.25,1.4) 132(43.85,1.4) 134(44.45,1.4) 136(45.05,1.4) 138(45.65,1.4) 140(46.25,1.4) 142(46.85,1.4) 144(47.45,1.4) 146(48.05,1.4) 148(48.65,1.4) 150(49.25,1.4) 152(49.85,1.4) 154(50.45,1.4) 156(51.05,1.4) 158(51.65,1.4) 160(52.25,1.4) 162(52.85,1.4) 164(53.45,1.4) 166(54.05,1.4) 168(54.65,1.4) 170(55.25,1.4) 172(55.85,1.4) 174(56.45,1.4) 176(57.05,1.4) 178(57.65,1.4) 180(58.25,1.4) 182(58.85,1.4) 184(59.45,1.4) 186(60.05,1.4) 188(60.65,1.4) 190(61.25,1.4) 192(61.85,1.4) 194(62.45,1.4) 196(63.05,1.4) 198(63.65,1.4) 200(64.25,1.4) 202(64.85,1.4) 204(65.45,1.4)
  round 1.8 hole 1.8: 9(2,6) 9(65.6,6)
HDR1X3 [mm] "Connector; Header; 3 Position"
  rect 1.5x1.5 hole 0.9: 1(0,0)
  round 1.5 hole 0.9: 2(2.54,0) 3(5.08,0)
  silkscreen extent -1.27,-1.27 6.35,1.27
HDR1X4 [mm] "Connector; Header; 4 Position"
  rect 1.5x1.5 hole 0.9: 1(0,0)
  round 1.5 hole 0.9: 2(2.54,0) 3(5.08,0) 4(7.62,0)
  silkscreen extent -1.27,-1.27 8.89,1.27
KSTN-5019_V [mm] "Test Point, 1-Leads, Body 3.81x2.03mm"
  rect 3.8x2.03 smd: 1(0,0)
  body extent -1.9,-1.01 1.9,1.02, height 2.29
SBG484 [mm] "BGA, 484-Balls, Body 19x19mm, Pitch 0.8mm"
  round 0.45 smd: A1(-8.4,8.4) A2(-7.6,8.4) A3(-6.8,8.4) A4(-6,8.4) A5(-5.2,8.4) A6(-4.4,8.4) A7(-3.6,8.4) A8(-2.8,8.4) A9(-2,8.4) A10(-1.2,8.4) A11(-0.4,8.4) A12(0.4,8.4) A13(1.2,8.4) A14(2,8.4) A15(2.8,8.4) A16(3.6,8.4) A17(4.4,8.4) A18(5.2,8.4) A19(6,8.4) A20(6.8,8.4) A21(7.6,8.4) A22(8.4,8.4) AA1(-8.4,-7.6) AA2(-7.6,-7.6) AA3(-6.8,-7.6) AA4(-6,-7.6) AA5(-5.2,-7.6) AA6(-4.4,-7.6) AA7(-3.6,-7.6) AA8(-2.8,-7.6) AA9(-2,-7.6) AA10(-1.2,-7.6) AA11(-0.4,-7.6) AA12(0.4,-7.6) AA13(1.2,-7.6) AA14(2,-7.6) AA15(2.8,-7.6) AA16(3.6,-7.6) AA17(4.4,-7.6) AA18(5.2,-7.6) AA19(6,-7.6) AA20(6.8,-7.6) AA21(7.6,-7.6) AA22(8.4,-7.6) AB1(-8.4,-8.4) AB2(-7.6,-8.4) AB3(-6.8,-8.4) AB4(-6,-8.4) AB5(-5.2,-8.4) AB6(-4.4,-8.4) AB7(-3.6,-8.4) AB8(-2.8,-8.4) AB9(-2,-8.4) AB10(-1.2,-8.4) AB11(-0.4,-8.4) AB12(0.4,-8.4) AB13(1.2,-8.4) AB14(2,-8.4) AB15(2.8,-8.4) AB16(3.6,-8.4) AB17(4.4,-8.4) AB18(5.2,-8.4) AB19(6,-8.4) AB20(6.8,-8.4) AB21(7.6,-8.4) AB22(8.4,-8.4) B1(-8.4,7.6) B2(-7.6,7.6) B3(-6.8,7.6) B4(-6,7.6) B5(-5.2,7.6) B6(-4.4,7.6) B7(-3.6,7.6) B8(-2.8,7.6) B9(-2,7.6) B10(-1.2,7.6) B11(-0.4,7.6) B12(0.4,7.6) B13(1.2,7.6) B14(2,7.6) B15(2.8,7.6) B16(3.6,7.6) B17(4.4,7.6) B18(5.2,7.6) B19(6,7.6) B20(6.8,7.6) B21(7.6,7.6) B22(8.4,7.6) C1(-8.4,6.8) C2(-7.6,6.8) C3(-6.8,6.8) C4(-6,6.8) C5(-5.2,6.8) C6(-4.4,6.8) C7(-3.6,6.8) C8(-2.8,6.8) C9(-2,6.8) C10(-1.2,6.8) C11(-0.4,6.8) C12(0.4,6.8) C13(1.2,6.8) C14(2,6.8) C15(2.8,6.8) C16(3.6,6.8) C17(4.4,6.8) C18(5.2,6.8) C19(6,6.8) C20(6.8,6.8) C21(7.6,6.8) C22(8.4,6.8) D1(-8.4,6) D2(-7.6,6) D3(-6.8,6) D4(-6,6) D5(-5.2,6) D6(-4.4,6) D7(-3.6,6) D8(-2.8,6) D9(-2,6) D10(-1.2,6) D11(-0.4,6) D12(0.4,6) D13(1.2,6) D14(2,6) D15(2.8,6) D16(3.6,6) D17(4.4,6) D18(5.2,6) D19(6,6) D20(6.8,6) D21(7.6,6) D22(8.4,6) E1(-8.4,5.2) E2(-7.6,5.2) E3(-6.8,5.2) E4(-6,5.2) E5(-5.2,5.2) E6(-4.4,5.2) E7(-3.6,5.2) E8(-2.8,5.2) E9(-2,5.2) E10(-1.2,5.2) E11(-0.4,5.2) E12(0.4,5.2) E13(1.2,5.2) E14(2,5.2) E15(2.8,5.2) E16(3.6,5.2) E17(4.4,5.2) E18(5.2,5.2) E19(6,5.2) E20(6.8,5.2) E21(7.6,5.2) E22(8.4,5.2) F1(-8.4,4.4) F2(-7.6,4.4) F3(-6.8,4.4) F4(-6,4.4) F5(-5.2,4.4) F6(-4.4,4.4) F7(-3.6,4.4) F8(-2.8,4.4) F9(-2,4.4) F10(-1.2,4.4) F11(-0.4,4.4) F12(0.4,4.4) F13(1.2,4.4) F14(2,4.4) F15(2.8,4.4) F16(3.6,4.4) F17(4.4,4.4) F18(5.2,4.4) F19(6,4.4) F20(6.8,4.4) F21(7.6,4.4) F22(8.4,4.4) G1(-8.4,3.6) G2(-7.6,3.6) G3(-6.8,3.6) G4(-6,3.6) G5(-5.2,3.6) G6(-4.4,3.6) G7(-3.6,3.6) G8(-2.8,3.6) G9(-2,3.6) G10(-1.2,3.6) G11(-0.4,3.6) G12(0.4,3.6) G13(1.2,3.6) G14(2,3.6) G15(2.8,3.6) G16(3.6,3.6) G17(4.4,3.6) G18(5.2,3.6) G19(6,3.6) G20(6.8,3.6) G21(7.6,3.6) G22(8.4,3.6) H1(-8.4,2.8) H2(-7.6,2.8) H3(-6.8,2.8) H4(-6,2.8) H5(-5.2,2.8) H6(-4.4,2.8) H7(-3.6,2.8) H8(-2.8,2.8) H9(-2,2.8) H10(-1.2,2.8) H11(-0.4,2.8) H12(0.4,2.8) H13(1.2,2.8) H14(2,2.8) H15(2.8,2.8) H16(3.6,2.8) H17(4.4,2.8) H18(5.2,2.8) H19(6,2.8) H20(6.8,2.8) H21(7.6,2.8) H22(8.4,2.8) J1(-8.4,2) J2(-7.6,2) J3(-6.8,2) J4(-6,2) J5(-5.2,2) J6(-4.4,2) J7(-3.6,2) J8(-2.8,2) J9(-2,2) J10(-1.2,2) J11(-0.4,2) J12(0.4,2) J13(1.2,2) J14(2,2) J15(2.8,2) J16(3.6,2) J17(4.4,2) J18(5.2,2) J19(6,2) J20(6.8,2) J21(7.6,2) J22(8.4,2) K1(-8.4,1.2) K2(-7.6,1.2) K3(-6.8,1.2) K4(-6,1.2) K5(-5.2,1.2) K6(-4.4,1.2) K7(-3.6,1.2) K8(-2.8,1.2) K9(-2,1.2) K10(-1.2,1.2) K11(-0.4,1.2) K12(0.4,1.2) K13(1.2,1.2) K14(2,1.2) K15(2.8,1.2) K16(3.6,1.2) K17(4.4,1.2) K18(5.2,1.2) K19(6,1.2) K20(6.8,1.2) K21(7.6,1.2) K22(8.4,1.2) L1(-8.4,0.4) L2(-7.6,0.4) L3(-6.8,0.4) L4(-6,0.4) L5(-5.2,0.4) L6(-4.4,0.4) L7(-3.6,0.4) L8(-2.8,0.4) L9(-2,0.4) L10(-1.2,0.4) L11(-0.4,0.4) L12(0.4,0.4) L13(1.2,0.4) L14(2,0.4) L15(2.8,0.4) L16(3.6,0.4) L17(4.4,0.4) L18(5.2,0.4) L19(6,0.4) L20(6.8,0.4) L21(7.6,0.4) L22(8.4,0.4) M1(-8.4,-0.4) M2(-7.6,-0.4) M3(-6.8,-0.4) M4(-6,-0.4) M5(-5.2,-0.4) M6(-4.4,-0.4) M7(-3.6,-0.4) M8(-2.8,-0.4) M9(-2,-0.4) M10(-1.2,-0.4) M11(-0.4,-0.4) M12(0.4,-0.4) M13(1.2,-0.4) M14(2,-0.4) M15(2.8,-0.4) M16(3.6,-0.4) M17(4.4,-0.4) M18(5.2,-0.4) M19(6,-0.4) M20(6.8,-0.4) M21(7.6,-0.4) M22(8.4,-0.4) N1(-8.4,-1.2) N2(-7.6,-1.2) N3(-6.8,-1.2) N4(-6,-1.2) N5(-5.2,-1.2) N6(-4.4,-1.2) N7(-3.6,-1.2) N8(-2.8,-1.2) N9(-2,-1.2) N10(-1.2,-1.2) N11(-0.4,-1.2) N12(0.4,-1.2) N13(1.2,-1.2) N14(2,-1.2) N15(2.8,-1.2) N16(3.6,-1.2) N17(4.4,-1.2) N18(5.2,-1.2) N19(6,-1.2) N20(6.8,-1.2) N21(7.6,-1.2) N22(8.4,-1.2) P1(-8.4,-2) P2(-7.6,-2) P3(-6.8,-2) P4(-6,-2) P5(-5.2,-2) P6(-4.4,-2) P7(-3.6,-2) P8(-2.8,-2) P9(-2,-2) P10(-1.2,-2) P11(-0.4,-2) P12(0.4,-2) P13(1.2,-2) P14(2,-2) P15(2.8,-2) P16(3.6,-2) P17(4.4,-2) P18(5.2,-2) P19(6,-2) P20(6.8,-2) P21(7.6,-2) P22(8.4,-2) R1(-8.4,-2.8) R2(-7.6,-2.8) R3(-6.8,-2.8) R4(-6,-2.8) R5(-5.2,-2.8) R6(-4.4,-2.8) R7(-3.6,-2.8) R8(-2.8,-2.8) R9(-2,-2.8) R10(-1.2,-2.8) R11(-0.4,-2.8) R12(0.4,-2.8) R13(1.2,-2.8) R14(2,-2.8) R15(2.8,-2.8) R16(3.6,-2.8) R17(4.4,-2.8) R18(5.2,-2.8) R19(6,-2.8) R20(6.8,-2.8) R21(7.6,-2.8) R22(8.4,-2.8) T1(-8.4,-3.6) T2(-7.6,-3.6) T3(-6.8,-3.6) T4(-6,-3.6) T5(-5.2,-3.6) T6(-4.4,-3.6) T7(-3.6,-3.6) T8(-2.8,-3.6) T9(-2,-3.6) T10(-1.2,-3.6) T11(-0.4,-3.6) T12(0.4,-3.6) T13(1.2,-3.6) T14(2,-3.6) T15(2.8,-3.6) T16(3.6,-3.6) T17(4.4,-3.6) T18(5.2,-3.6) T19(6,-3.6) T20(6.8,-3.6) T21(7.6,-3.6) T22(8.4,-3.6) U1(-8.4,-4.4) U2(-7.6,-4.4) U3(-6.8,-4.4) U4(-6,-4.4) U5(-5.2,-4.4) U6(-4.4,-4.4) U7(-3.6,-4.4) U8(-2.8,-4.4) U9(-2,-4.4) U10(-1.2,-4.4) U11(-0.4,-4.4) U12(0.4,-4.4) U13(1.2,-4.4) U14(2,-4.4) U15(2.8,-4.4) U16(3.6,-4.4) U17(4.4,-4.4) U18(5.2,-4.4) U19(6,-4.4) U20(6.8,-4.4) U21(7.6,-4.4) U22(8.4,-4.4) V1(-8.4,-5.2) V2(-7.6,-5.2) V3(-6.8,-5.2) V4(-6,-5.2) V5(-5.2,-5.2) V6(-4.4,-5.2) V7(-3.6,-5.2) V8(-2.8,-5.2) V9(-2,-5.2) V10(-1.2,-5.2) V11(-0.4,-5.2) V12(0.4,-5.2) V13(1.2,-5.2) V14(2,-5.2) V15(2.8,-5.2) V16(3.6,-5.2) V17(4.4,-5.2) V18(5.2,-5.2) V19(6,-5.2) V20(6.8,-5.2) V21(7.6,-5.2) V22(8.4,-5.2) W1(-8.4,-6) W2(-7.6,-6) W3(-6.8,-6) W4(-6,-6) W5(-5.2,-6) W6(-4.4,-6) W7(-3.6,-6) W8(-2.8,-6) W9(-2,-6) W10(-1.2,-6) W11(-0.4,-6) W12(0.4,-6) W13(1.2,-6) W14(2,-6) W15(2.8,-6) W16(3.6,-6) W17(4.4,-6) W18(5.2,-6) W19(6,-6) W20(6.8,-6) W21(7.6,-6) W22(8.4,-6) Y1(-8.4,-6.8) Y2(-7.6,-6.8) Y3(-6.8,-6.8) Y4(-6,-6.8) Y5(-5.2,-6.8) Y6(-4.4,-6.8) Y7(-3.6,-6.8) Y8(-2.8,-6.8) Y9(-2,-6.8) Y10(-1.2,-6.8) Y11(-0.4,-6.8) Y12(0.4,-6.8) Y13(1.2,-6.8) Y14(2,-6.8) Y15(2.8,-6.8) Y16(3.6,-6.8) Y17(4.4,-6.8) Y18(5.2,-6.8) Y19(6,-6.8) Y20(6.8,-6.8) Y21(7.6,-6.8) Y22(8.4,-6.8)
  silkscreen extent -10.27,-9.5 9.5,9.5, body extent -9.5,-9.5 9.5,9.5, height 2.44
"SiT8008 2.5x2" [mm]
  rect 1.1x1 smd: 1(-0.95,-0.75) 2(0.95,-0.75) 3(0.95,0.75) 4(-0.95,0.75)
  silkscreen extent -2.34,-2.21 1.78,1.52
TE_2013289-1 [mm]
  rect 0.4x2 smd: 1(-31.6,-4.1) 2(-31.3,4.1) 3(-31,-4.1) 4(-30.7,4.1) 5(-30.4,-4.1) 6(-30.1,4.1) 7(-29.8,-4.1) 8(-29.5,4.1) 9(-29.2,-4.1) 10(-28.9,4.1) 11(-28.6,-4.1) 12(-28.3,4.1) 13(-28,-4.1) 14(-27.7,4.1) 15(-27.4,-4.1) 16(-27.1,4.1) 17(-26.8,-4.1) 18(-26.5,4.1) 19(-26.2,-4.1) 20(-25.9,4.1) 21(-25.6,-4.1) 22(-25.3,4.1) 23(-25,-4.1) 24(-24.7,4.1) 25(-24.4,-4.1) 26(-24.1,4.1) 27(-23.8,-4.1) 28(-23.5,4.1) 29(-23.2,-4.1) 30(-22.9,4.1) 31(-22.6,-4.1) 32(-22.3,4.1) 33(-22,-4.1) 34(-21.7,4.1) 35(-21.4,-4.1) 36(-21.1,4.1) 37(-20.8,-4.1) 38(-20.5,4.1) 39(-20.2,-4.1) 40(-19.9,4.1) 41(-19.6,-4.1) 42(-19.3,4.1) 43(-19,-4.1) 44(-18.7,4.1) 45(-18.4,-4.1) 46(-18.1,4.1) 47(-17.8,-4.1) 48(-17.5,4.1) 49(-17.2,-4.1) 50(-16.9,4.1) 51(-16.6,-4.1) 52(-16.3,4.1) 53(-16,-4.1) 54(-15.7,4.1) 55(-15.4,-4.1) 56(-15.1,4.1) 57(-14.8,-4.1) 58(-14.5,4.1) 59(-14.2,-4.1) 60(-13.9,4.1) 61(-13.6,-4.1) 62(-13.3,4.1) 63(-13,-4.1) 64(-12.7,4.1) 65(-12.4,-4.1) 66(-12.1,4.1) 67(-11.8,-4.1) 68(-11.5,4.1) 69(-11.2,-4.1) 70(-10.9,4.1) 71(-10.6,-4.1) 72(-10.3,4.1) 73(-7.6,-4.1) 74(-7.3,4.1) 75(-7,-4.1) 76(-6.7,4.1) 77(-6.4,-4.1) 78(-6.1,4.1) 79(-5.8,-4.1) 80(-5.5,4.1) 81(-5.2,-4.1) 82(-4.9,4.1) 83(-4.6,-4.1) 84(-4.3,4.1) 85(-4,-4.1) 86(-3.7,4.1) 87(-3.4,-4.1) 88(-3.1,4.1) 89(-2.8,-4.1) 90(-2.5,4.1) 91(-2.2,-4.1) 92(-1.9,4.1) 93(-1.6,-4.1) 94(-1.3,4.1) 95(-1,-4.1) 96(-0.7,4.1) 97(-0.4,-4.1) 98(-0.1,4.1) 99(0.2,-4.1) 100(0.5,4.1) 101(0.8,-4.1) 102(1.1,4.1) 103(1.4,-4.1) 104(1.7,4.1) 105(2,-4.1) 106(2.3,4.1) 107(2.6,-4.1) 108(2.9,4.1) 109(3.2,-4.1) 110(3.5,4.1) 111(3.8,-4.1) 112(4.1,4.1) 113(4.4,-4.1) 114(4.7,4.1) 115(5,-4.1) 116(5.3,4.1) 117(5.6,-4.1) 118(5.9,4.1) 119(6.2,-4.1) 120(6.5,4.1) 121(6.8,-4.1) 122(7.1,4.1) 123(7.4,-4.1) 124(7.7,4.1) 125(8,-4.1) 126(8.3,4.1) 127(8.6,-4.1) 128(8.9,4.1) 129(9.2,-4.1) 130(9.5,4.1) 131(9.8,-4.1) 132(10.1,4.1) 133(10.4,-4.1) 134(10.7,4.1) 135(11,-4.1) 136(11.3,4.1) 137(11.6,-4.1) 138(11.9,4.1) 139(12.2,-4.1) 140(12.5,4.1) 141(12.8,-4.1) 142(13.1,4.1) 143(13.4,-4.1) 144(13.7,4.1) 145(14,-4.1) 146(14.3,4.1) 147(14.6,-4.1) 148(14.9,4.1) 149(15.2,-4.1) 150(15.5,4.1) 151(15.8,-4.1) 152(16.1,4.1) 153(16.4,-4.1) 154(16.7,4.1) 155(17,-4.1) 156(17.3,4.1) 157(17.6,-4.1) 158(17.9,4.1) 159(18.2,-4.1) 160(18.5,4.1) 161(18.8,-4.1) 162(19.1,4.1) 163(19.4,-4.1) 164(19.7,4.1) 165(20,-4.1) 166(20.3,4.1) 167(20.6,-4.1) 168(20.9,4.1) 169(21.2,-4.1) 170(21.5,4.1) 171(21.8,-4.1) 172(22.1,4.1) 173(22.4,-4.1) 174(22.7,4.1) 175(23,-4.1) 176(23.3,4.1) 177(23.6,-4.1) 178(23.9,4.1) 179(24.2,-4.1) 180(24.5,4.1) 181(24.8,-4.1) 182(25.1,4.1) 183(25.4,-4.1) 184(25.7,4.1) 185(26,-4.1) 186(26.3,4.1) 187(26.6,-4.1) 188(26.9,4.1) 189(27.2,-4.1) 190(27.5,4.1) 191(27.8,-4.1) 192(28.1,4.1) 193(28.4,-4.1) 194(28.7,4.1) 195(29,-4.1) 196(29.3,4.1) 197(29.6,-4.1) 198(29.9,4.1) 199(30.2,-4.1) 200(30.5,4.1) 201(30.8,-4.1) 202(31.1,4.1) 203(31.4,-4.1) 204(31.7,4.1)
  rect 3.5x4.6 smd: P$1(-32.75,12) P$2(32.85,12)
  round 1.65 hole 1.65 unplated: ""(-33.35,0)
  round 1.15 hole 1.15 unplated: ""(33.45,0)
  silkscreen extent -35.1,-4.7 35.1,21.6, body extent -35.75,-5.02 35.85,21.52, height 5.52
TSOP-48_TSOP1_SPA [mil]
  rect 47.5x11 smd paste+0 mask+0: 1(-387.75,226.38) 2(-387.75,206.69) 3(-387.75,187.01) 4(-387.75,167.32) 5(-387.75,147.64) 6(-387.75,127.95) 7(-387.75,108.27) 8(-387.75,88.58) 9(-387.75,68.9) 10(-387.75,49.21) 11(-387.75,29.53) 12(-387.75,9.84) 13(-387.75,-9.84) 14(-387.75,-29.53) 15(-387.75,-49.21) 16(-387.75,-68.9) 17(-387.75,-88.58) 18(-387.75,-108.27) 19(-387.75,-127.95) 20(-387.75,-147.64) 21(-387.75,-167.32) 22(-387.75,-187.01) 23(-387.75,-206.69) 24(-387.75,-226.38) 25(387.75,-226.38) 26(387.75,-206.69) 27(387.75,-187.01) 28(387.75,-167.32) 29(387.75,-147.64) 30(387.75,-127.95) 31(387.75,-108.27) 32(387.75,-88.58) 33(387.75,-68.9) 34(387.75,-49.21) 35(387.75,-29.53) 36(387.75,-9.84) 37(387.75,9.84) 38(387.75,29.53) 39(387.75,49.21) 40(387.75,68.9) 41(387.75,88.58) 42(387.75,108.27) 43(387.75,127.95) 44(387.75,147.64) 45(387.75,167.32) 46(387.75,187.01) 47(387.75,206.69) 48(387.75,226.38)
  silkscreen extent -432,-243 432,243, body extent 0,0 10,10, height 10

## Part data
C1 C2 C3 C4 C7 C9 C10 C11 C16 C18 C19 C20 C25 C27 C28 C29 C34 C35 C36 C41 C43 C45 C47 C49 C50 C51 C52 C53 C54 C55 C56 C57 C58 C59 C60: library part 885012106015, "CAP CER 0.47UF 16V X5R 0603", Device Package="0603 (1608 Metric)", Manufacturer="Würth Elektronik", Operating Temperature="-55°C ~ 85°C", Supplier Part Number 1=732-7912-1-ND, Temperature Coefficient=X5R, Tolerance=±20%, Voltage - Rated=16V, Applications="General Purpose", Capacitance=0.47µF, ComponentLink1Description=Datasheet, ComponentLink1URL=https://katalog.we-online.de/pbs/datasheet/885012106015.pdf, ComponentLink2Description="DigiKey Link", ComponentLink2URL=http://digikey.com/product-detail/en/w-rth-elektronik/885012106015/732-7912-1-ND/5454539, LastUpdated="2020-09-02 1:03:18 AM", Lifecycle Status=Active, Minimum Order=1, Mounting Type="Surface Mount, MLCC", Package / Case="0603 (1608 Metric)", Packaging=TapeAndReel, Part Number=885012106015, Part Status=Active, PartId=11963, Price=0.04, Series=WCAP-CSGP, Size / Dimension="0.063\" L x 0.031\" W (1.60mm x 0.80mm)", Supplier 1=DigiKey, Thickness (Max)="0.037\" (0.95mm)"
C5: library part CL10A475KQ8NNNC, "CAP CER 4.7UF 6.3V X5R 0603", Device Package="0603 (1608 Metric)", Manufacturer="Samsung Electro-Mechanics", Operating Temperature="-55°C ~ 85°C", Supplier Part Number 1=1276-1045-1-ND, Temperature Coefficient=X5R, Tolerance=±10%, Voltage - Rated=6.3V, Applications="General Purpose", Capacitance=4.7µF, ComponentLink1Description=Datasheet, ComponentLink1URL=http://www.samsungsem.com/kr/support/product-search/mlcc/CL10A475KQ8NNNC.jsp, ComponentLink2Description="DigiKey Link", ComponentLink2URL=http://digikey.com/product-detail/en/samsung-electro-mechanics/CL10A475KQ8NNNC/1276-1045-1-ND/3889131, LastUpdated="2020-09-02 1:03:30 AM", Lifecycle Status=Active, Minimum Order=1, Mounting Type="Surface Mount, MLCC", Package / Case="0603 (1608 Metric)", Packaging=TapeAndReel, Part Number=CL10A475KQ8NNNC, Part Status=Active, PartId=5557, Price=0.01, Series=CL, Size / Dimension="0.063\" L x 0.031\" W (1.60mm x 0.80mm)", Supplier 1=DigiKey, Thickness (Max)="0.035\" (0.90mm)"
C6 C8 C12 C13 C14 C15 C17 C21 C22 C23 C24 C26 C30 C31 C32 C33 C37 C38 C39 C40 C42 C44 C46 C48 C61 C62: library part GRM21BR61A476ME15L, "CAP CER 47UF 10V X5R 0805", Device Package="0805 (2012 Metric)", Manufacturer="Murata Electronics", Operating Temperature="-55°C ~ 85°C", Supplier Part Number 1=490-9961-1-ND, Temperature Coefficient=X5R, Tolerance=±20%, Voltage - Rated=10V, Applications="General Purpose", Capacitance=47µF, ComponentLink1Description=Datasheet, ComponentLink1URL=https://search.murata.co.jp/Ceramy/image/img/A01X/G101/ENG/GRM21BR61A476ME15-01.pdf, ComponentLink2Description="DigiKey Link", ComponentLink2URL=http://digikey.com/product-detail/en/murata-electronics/GRM21BR61A476ME15L/490-9961-1-ND/5026442, LastUpdated="2020-09-02 1:04:38 AM", Lifecycle Status=Active, Minimum Order=1, Mounting Type="Surface Mount, MLCC", Package / Case="0805 (2012 Metric)", Packaging=TapeAndReel, Part Number=GRM21BR61A476ME15L, Part Status=Active, PartId=4627, Price=0.19, Series=GRM, Size / Dimension="0.079\" L x 0.049\" W (2.00mm x 1.25mm)", Supplier 1=DigiKey, Thickness (Max)="0.057\" (1.45mm)"
J1 J2: "204 Position 0.6 mm Pitch Right Angle Surface Mount Socket DIMM Connector", Package=None, Centerline_Pitch=".6 mm[.024 in]", Digi-Key_Part_Number=A115021-ND, Digi-Key_Purchase_URL=https://www.digikey.com/product-detail/en/te-connectivity-amp-connectors/2013289-1/A115021-ND/2135546?utm_source=snapeda&utm_medium=aggregator&utm_campaign=symbol, MF="TE Connectivity", MP=2013289-1, Number_of_Positions=204, Product_Type=Socket, SnapEDA_Link=https://www.snapeda.com/parts/2013289-1/TE%20Connectivity%20AMP%20Connectors/view-part/231016/?ref=snap, TE_purchase_URL=https://www.te.com/usa-en/product-2013289-1.html?te_bu=Cor&te_type=disp&te_campaign=seda_glo_cor-seda-global-disp-prtnr-fy19-seda-model-bom-cta_sma-317_1&elqCampaignId=32493
P1 P2 P3: "Header, 3-Pin", LatestRevisionDate=17-Jul-2002, LatestRevisionNote="Re-released for DXP Platform.", Publisher="Altium Limited"
P4 P5: "Header, 4-Pin", LatestRevisionDate=17-Jul-2002, LatestRevisionNote="Re-released for DXP Platform.", Publisher="Altium Limited"
TP1 TP2 TP3 TP4 TP5 TP6 TP7 TP8 TP9: library part CMP-1672-00008-1, "Test Point, 1 Position SMD, RoHS, Tape and Reel", Package Quantity=1000, ComponentLink1Description="Manufacturer URL", ComponentLink1URL=http://www.keyelco.com/, ComponentLink2Description=Datasheet, ComponentLink2URL=http://www.keyelco.com/product-pdf.cfm?p=1357, Contact Plating=Silver, DatasheetVersion=03/2014, Mount="Surface Mount", Mounting Technology="Surface Mount", PackageDescription="1-Pin Surface Mount Device, Body 3.81 x 2.03 mm", PackageReference=5019, Packaging="Tape and Reel", Pins=1, RoHSCompliant=True
U1: "No Description Available", Mfr_Name="Cypress Semiconductor", Copyright="Copyright (C) 2021 Ultra Librarian. All rights reserved.", Digi-Key_Part_Number_1=428-4274-ND, Digi-Key_Part_Number_2=2120-S34MS01G200TFI000-ND, Digi-Key_Part_Number_3=2832-S34MS01G200TFI000-ND, Manufacturer_Part_Number=S34ML02G200TFA000, RefDes=RefDes, Type=DEV
U2: "Artix-7 FPGA, 285 User I/Os, 4 GTP, 484-Ball BGA, Speed Grade 1, Commercial Grade, Pb-Free", Generic Part Number=XC7A200T, Manufacturer=Xilinx, Supplier Part Number 1=122-1867-ND, Block RAM Blocks (18Kb)=730, Block RAM Blocks (36Kb)=365, Block RAM Blocks (Max Kb)=13140, CLBs (Max Distributed RAM Kb)=2888, CLBs (Slices)=33650, Clock Mgmt Tiles (CMTs)=10, Code_JEDEC=MO-275-PPA2, ComponentLink1Description="Manufacturer URL", ComponentLink1URL=http://www.xilinx.com/, ComponentLink2Description=Datasheet, ComponentLink2URL=http://www.xilinx.com/support/documentation/data_sheets/ds180_7Series_Overview.pdf, ComponentLink3Description="Package Specification", ComponentLink3URL=http://www.xilinx.com/support/documentation/user_guides/ug475_7Series_Pkg_Pinout.pdf, ComponentLink4Description="DC and Switching Characteristics", ComponentLink4URL=http://www.xilinx.com/support/documentation/data_sheets/ds181_Artix_7_Data_Sheet.pdf, ComponentLink5Description="Package File", ComponentLink5URL=http://www.xilinx.com/support/packagefiles/a7packages/xc7a200tsbg484pkg.txt, ComponentLink6Description="Packaging and Pinout", ComponentLink6URL=http://www.xilinx.com/support/documentation/user_guides/ug475_7Series_Pkg_Pinout.pdf, DatasheetVersion=v1.12, DSP48E1 Slices=740, Logic Cells=215360, Max User I/O=500, Mounting Technology="Surface Mount", NexusDeviceID=XC7A200T-1SBG484C, PackageDescription="Flip-Chip Lidless BGA, Body 19 x 19 mm, 0.8 mm Pitch", PackageReference=SBG484, PackageVersion="Rev 1.8", PartNumber=XC7A200T-1SBG484C, RoHS=Pb-Free, Speed Grade=-1, Supplier 1=Digi-Key

## Via types
v1: diameter 18.9, hole 9.84, Layer 1 to Layer 8, 113 vias
v2: diameter 15.75, hole 7.87, Layer 1 to Layer 8, 39 vias

## Nets (pads, with @x,y where several pads share a name; then routed paths per layer and width w, separated by ;. In a path a pad name is that pad's centre, name@x,y a point inside that pad or via, vN(x,y) a via of type N, cw(c..) or ccw(c..) an arc to the next point about the centre after c; other vN are vias at no path point)
1v: C7.2 C8.2 C9.2 C10.2 C11.2 C12.2 C13.2 C14.2 C15.2 C25.2 C26.2 J2.1 J2.2 J2.3 J2.4 TP6.1 U2.D6 U2.D10 U2.E8 U2.F7 U2.F9 U2.H8 U2.H10 U2.J7 U2.J9 U2.J11 U2.K8 U2.L7 U2.L11 U2.M8 U2.N7 U2.N11 U2.P8 U2.P10 U2.R7 U2.R9 U2.T8 U2.T10 | length 1307.3
  Layer 1 w4: U2.F7@2104.04,1910.05 U2.F7@2104.04,1911.06 U2.E8@2072.54,1942.55 U2.F9@2104.04,1974.05 ; U2.H10@2167.03,2005.54 U2.J11@2198.53,2037.04 ; U2.J7@2198.53,1911.06 U2.H8@2167.03,1942.55 U2.J9@2198.53,1974.05 U2.K8@2230.02,1942.55 2245.77,1926.8 ; 2246.02,1630.03 2245.77,1630.28 2245.77,1926.8 ; U2.L11@2261.52,2037.04 v1(2276.37,2051.89) 2277.51,2053.03 2308.52,2053.03 U2.N11@2324.51,2037.04 U2.P10@2356.01,2005.54 U2.R9@2387.5,1974.05 ; 2339.02,1640.03 2340.26,1641.27 2340.26,1926.8 ; U2.R7@2387.5,1911.06 U2.P8@2356.01,1942.55 2340.26,1926.8 ; 2403.25,1958.3 U2.R9@2387.5,1974.05 ; U2.T10@2419,2005.54 U2.R9@2387.5,1974.05 ; 2245.77,1926.8 U2.L7@2261.52,1911.06 U2.M8@2293.02,1942.55 U2.N7@2324.51,1911.06 2340.26,1926.8
1v2: J2.7 J2.8 TP8.1 U2.B5 U2.B7 U2.B9 U2.B11 U2.C4 U2.C8 | length 210.4
  Layer 1 w4: U2.B5@1978.06,1848.06 U2.C4@2009.55,1816.57 ; U2.B7@1978.06,1911.06 U2.C8@2009.55,1942.55 U2.B9@1978.06,1974.05 1994.02,1990.02 1994.02,2022.03 1979.02,2037.04 U2.B11@1978.06,2037.04
1v8: C16.2 C17.2 C18.2 C19.2 C20.2 C21.2 C22.2 C23.2 C24.2 J2.11 J2.12 TP9.1 U2.H12 U2.K10 U2.K12 U2.M12 U2.P12 U2.R11 | length 369.9
  Layer 1 w4: U2.M12@2293.02,2068.54 v1(2307.87,2083.39) ; U2.P12@2356.01,2068.54 2371.76,2052.79 ; U2.R11@2387.5,2037.04 2371.76,2052.79 ; 2676.02,2053.03 2675.78,2052.79 2371.76,2052.79
1v25: J2.21 TP7.1 U2.M10
3v3: C1.2 C2.2 C3.2 C4.2 C5.2 C6.2 C27.2 C28.2 C29.2 C30.2 C31.2 C32.2 C33.2 C34.2 C35.2 C36.2 C37.2 C38.2 C39.2 C40.2 J1.199 J2.15 J2.16 J2.17 J2.18 P1.1 P2.1 P3.1 Q1.1 Q1.4 TP5.1 U1.12 U1.34 U1.37 U1.39 U2.A17 U2.AA7 U2.AA17 U2.AB4 U2.AB14 U2.B14 U2.C1 U2.C21 U2.D18 U2.E15 U2.F2 U2.F12 U2.F22 U2.G19 U2.H6 U2.H16 U2.J3 U2.J13 U2.K20 U2.L17 U2.M4 U2.M14 U2.N1 U2.N21 U2.P18 U2.R5 U2.R15 U2.T2 U2.T12 U2.T22 U2.U8 U2.U19 U2.V6 U2.V16 U2.W3 U2.W13 U2.Y10 U2.Y20 | length 261.9
  Layer 1 w4: v1(1994.7,2337.15) U2.C21@2009.55,2352 ; U2.D18@2041.05,2257.51 2025,2241.46 2025,2187 2033,2179 2056.57,2179 U2.E15@2072.54,2163.02 v1(2087.39,2177.87) ; U2.H16@2167.03,2194.52 v2(2181.88,2209.37) ; U2.W13@2513.49,2100.03 v1(2528.34,2114.88) ; U2.AB14@2607.98,2131.53 2608.22,2131.28 2650.78,2131.28 v1(2651.02,2131.03)
A0: J1.98 U2.K22
A1: J1.97 U2.K21
A2: J1.96 U2.G20
A3: J1.95 U2.H20
A4: J1.92 U2.H22
A5: J1.91 U2.J22
A6: J1.90 U2.H18
A7: J1.86 U2.H17
A8: J1.89 U2.H15
A9: J1.85 U2.J15
A10: J1.107 U2.G18
A11: J1.84 U2.G17
A12: J1.83 U2.G16
A13: J1.119 U2.G15
A14: J1.80 U2.G13
A15: J1.78 U2.H13
ALE: U1.17 U2.Y16
B0: J2.53 U2.AB2
B1: J2.55 U2.Y3
B2: J2.57 U2.AA3
B3: J2.59 U2.AA5
B4: J2.54 U2.AB5
B5: J2.56 U2.Y4
B6: J2.58 U2.AA4
B7: J2.60 U2.V4
BA0: J1.109 U2.J20
BA1: J1.108 U2.L21 | length 100.6
  Layer 1 w4: U2.L21@2261.52,2352 2277,2367.48 2277,2396.74 2292,2411.74 v2(2292,2440)
BA2: J1.79 U2.M21 | length 97.8
  Layer 1 w4: U2.M21@2293.02,2352 2309,2367.98 2309,2429 v2(2319,2439)
Busy: U1.7 U2.AB17
CAS: J1.115 U2.J19
CCLK: J2.30 U2.L12
CE: U1.9 U2.AB13
CK0_N: J1.103 U2.H14
CK0_P: J1.101 U2.J14
CK1_N: J1.104
CK1_P: J1.102
CKE0: J1.73 U2.M22
CLE: U1.16 U2.Y17
CLK0: Q1.3 U2.T5
CS0: J1.114 U2.N22
D2: J2.33 U2.P21
D3: J2.34 U2.R21
DONE: J2.96 TP4.1 U2.G11
DQ0: J1.5 U2.F13 | length 1744.5
  Layer 1 w5: U2.F13@2104.06,2100.03 v1(2118.6,2114.56)
  Layer 1 w7.7: v1(1154.33,2535) 1154.33,2537.36 1165.64,2548.67 1165.64,2599.81 J1.5@1165.28,2600.17
  Layer 3 w4.92: v1(1154.33,2535) 1155,2534.33 1155,2496 1552.91,2098.09 1597,2098.09 1624.38,2098.09 cw(c1624.38,2085.63) 1636.85,2085.63 1636.85,2043.09 ccw(c1649.31,2043.09) 1661.77,2043.09 1661.77,2092.62 cw(c1674.23,2092.62) 1686.69,2092.62 1686.69,2043.09 ccw(c1699.15,2043.09) 1711.61,2043.09 1711.61,2092.62 cw(c1724.07,2092.62) 1736.54,2092.62 1736.54,2043.09 ccw(c1749,2043.09) 1761.46,2043.09 1761.46,2092.62 cw(c1773.92,2092.62) 1786.38,2092.62 1786.38,2054.26 ccw(c1798.84,2054.26) 1811.3,2054.26 1811.3,2085.63 cw(c1823.77,2085.63) 1823.77,2098.09 1861.79,2098.09 1868.7,2105 2073,2105 2079.91,2098.09 2102.1,2098.09 v1(2118.6,2114.56)
DQ1: J1.7 U2.F14 | length 1741.4
  Layer 1 w5: U2.F14@2104.04,2131.53 v2(2118.89,2146.38)
  Layer 1 w7.7: J1.7@1188.9,2600.17 1189.95,2599.12 1189.95,2547.05 v1(1191,2546)
  Layer 3 w4.92: v1(1191,2546) 1301,2436 1376,2436 1391.11,2420.89 1410.48,2401.52 cw(c1401.67,2392.71) 1410.48,2383.9 1374.21,2347.64 ccw(c1383.02,2338.82) 1374.21,2330.01 ccw(c1383.02,2338.82) 1391.84,2330.01 1432.79,2370.97 cw(c1441.6,2362.16) 1450.41,2370.97 cw(c1441.6,2362.16) 1450.41,2353.34 1409.46,2312.39 ccw(c1418.27,2303.58) 1409.46,2294.77 ccw(c1418.27,2303.58) 1427.08,2294.77 1468.04,2335.72 cw(c1476.85,2326.91) 1485.66,2335.72 cw(c1476.85,2326.91) 1485.66,2318.1 1444.7,2277.14 ccw(c1453.52,2268.33) 1444.7,2259.52 ccw(c1453.52,2268.33) 1462.33,2259.52 1503.28,2300.48 cw(c1512.09,2291.66) 1520.91,2300.48 cw(c1512.09,2291.66) 1520.91,2282.85 1482.28,2244.23 ccw(c1491.09,2235.42) 1482.28,2226.61 ccw(c1491.09,2235.42) 1499.9,2226.61 1533.84,2260.54 cw(c1542.65,2251.73) 1551.46,2260.54 1565.01,2246.99 1665.09,2146.91 2064.36,2146.91 2080.8,2130.47 2093.98,2130.47 2103.3,2139.79 2103.3,2142.24 2106.19,2145.12 2117.63,2145.12 v2(2118.89,2146.38)
DQ2: J1.15 U2.F16 | length 1752.6
  Layer 1 w4.92: v1(1282,2656) 1282,2601.56 J1.15@1283.39,2600.17
  Layer 1 w5: U2.F16@2104.04,2194.52 v2(2118.56,2209.08)
  Layer 3 w4.92: v1(1282,2656) 1617.14,2320.86 1673.09,2264.91 ccw(c1681.9,2273.72) 1694.37,2273.72 1694.37,2292.43 cw(c1706.83,2292.43) 1719.29,2292.43 1719.29,2230.75 ccw(c1731.75,2230.75) 1744.21,2230.75 1744.21,2292.43 cw(c1756.67,2292.43) 1769.13,2292.43 1769.13,2230.75 ccw(c1781.6,2230.75) 1794.06,2230.75 1794.06,2292.43 cw(c1806.52,2292.43) 1818.98,2292.43 1818.98,2230.75 ccw(c1831.44,2230.75) 1843.9,2230.75 1843.9,2292.43 cw(c1856.36,2292.43) 1868.82,2292.43 1868.82,2230.75 ccw(c1881.29,2230.75) 1893.75,2230.75 1893.75,2253.53 cw(c1906.21,2253.53) 1918.67,2253.53 1918.67,2239.46 ccw(c1931.13,2239.46) 1931.13,2227 1965,2227 1967,2229 1967,2253.57 1969.88,2256.45 2004.55,2256.45 2035,2226 2058.38,2226 2059.43,2224.95 2103.3,2224.95 2118.56,2209.69 v2(2118.56,2209.08)
DQ3: J1.17 U2.E17 | length 1751.6
  Layer 1 w4.92: J1.17@1307.01,2600.17 v1(1307,2655)
  Layer 1 w5: U2.E17@2072.54,2226.02 v1(2087.39,2240.86)
  Layer 3 w4.92: v1(1307,2655) 1463.12,2498.88 1464.86,2497.14 ccw(c1473.67,2505.95) 1482.48,2497.14 1521.84,2536.51 cw(c1530.65,2527.69) 1539.47,2536.51 cw(c1530.65,2527.69) 1539.47,2518.88 1494.41,2473.83 ccw(c1503.22,2465.02) 1494.41,2456.21 ccw(c1503.22,2465.02) 1512.04,2456.21 1557.09,2501.26 cw(c1565.9,2492.45) 1574.71,2501.26 cw(c1565.9,2492.45) 1574.71,2483.64 1529.66,2438.58 ccw(c1538.47,2429.77) 1529.66,2420.96 ccw(c1538.47,2429.77) 1547.28,2420.96 1592.34,2466.01 cw(c1601.15,2457.2) 1609.96,2466.01 cw(c1601.15,2457.2) 1609.96,2448.39 1564.9,2403.34 ccw(c1573.72,2394.53) 1564.9,2385.71 ccw(c1573.72,2394.53) 1582.53,2385.71 1627.58,2430.77 cw(c1636.39,2421.96) 1645.2,2430.77 cw(c1636.39,2421.96) 1645.2,2413.15 1600.15,2368.09 ccw(c1608.96,2359.28) 1600.15,2350.47 ccw(c1608.96,2359.28) 1617.77,2350.47 1648.86,2381.55 cw(c1657.67,2372.74) 1666.48,2381.55 cw(c1657.67,2372.74) 1666.48,2363.93 1641.09,2338.54 ccw(c1649.9,2329.72) 1641.09,2320.91 1648.19,2313.81 1656.58,2313.81 1973.96,2313.81 2046.9,2240.86 v1(2087.39,2240.86)
DQ4: J1.4 U2.E13 | length 1739.8
  Layer 1 w5: U2.E13@2072.54,2100.03 2072.61,2100.03 v1(2086.65,2114) v1(2086.65,2114)
  Layer 1 w7.7: J1.4@1153.47,2923 1154.24,2922.24 1154.24,2868.76 v1(1155,2868)
  Layer 3 w4.92: v1(1155,2868) 1155,2662.5 1170.24,2647.26 1170.24,2504.76 1253.5,2421.5 1270.14,2404.86 ccw(c1278.96,2413.67) 1287.77,2404.86 1293.94,2411.02 cw(c1302.75,2402.21) 1311.56,2411.02 cw(c1302.75,2402.21) 1311.56,2393.4 1299.7,2381.54 ccw(c1308.51,2372.73) 1299.7,2363.92 ccw(c1308.51,2372.73) 1317.32,2363.92 1367.58,2414.18 cw(c1376.39,2405.37) 1385.2,2414.18 cw(c1376.39,2405.37) 1385.2,2396.55 1340.64,2351.99 ccw(c1349.45,2343.18) 1340.64,2334.36 1360,2315 1561,2114 v1(2086.65,2114)
DQ5: J1.6 U2.E14 | length 1739.7
  Layer 1 w5: U2.E14@2072.54,2131.53 v1(2087.39,2146.38)
  Layer 1 w7.7: J1.6@1177.09,2923 1177.55,2922.55 1177.55,2869.45 v1(1178,2869)
  Layer 3 w4.92: v1(1178,2869) 1178,2867.71 1165,2854.71 1165,2669 1231.76,2602.24 1251.2,2582.8 cw(c1242.39,2573.99) 1251.2,2565.18 1236.73,2550.71 ccw(c1245.54,2541.9) 1236.73,2533.09 ccw(c1245.54,2541.9) 1254.36,2533.09 1278.51,2557.25 cw(c1287.32,2548.43) 1296.13,2557.25 cw(c1287.32,2548.43) 1296.13,2539.62 1261.88,2505.36 ccw(c1270.69,2496.55) 1261.88,2487.74 ccw(c1270.69,2496.55) 1279.5,2487.74 1313.76,2522 cw(c1322.57,2513.19) 1331.38,2522 cw(c1322.57,2513.19) 1331.38,2504.38 1297.12,2470.12 ccw(c1305.93,2461.31) 1297.12,2452.5 ccw(c1305.93,2461.31) 1314.75,2452.5 1339.31,2477.06 cw(c1348.12,2468.25) 1356.94,2477.06 1358.68,2475.32 1678,2156 2073.99,2156 2083.61,2146.38 v1(2087.39,2146.38)
DQ6: J1.16 U2.E16 | length 1742.7
  Layer 1 w5: U2.E16@2072.56,2194.52 v1(2087.11,2209.04)
  Layer 1 w7.7: J1.16@1295.2,2923 1295.6,2922.6 1295.6,2870.4 v1(1296,2870)
  Layer 3 w4.92: v1(1296,2870) 1277.91,2851.91 1253,2827 1253,2825 cw(c1240.54,2825) 1240.54,2812.54 1200.06,2812.54 ccw(c1200.06,2800.07) 1200.06,2787.61 1243.62,2787.61 cw(c1243.62,2775.15) 1243.62,2762.69 1190.54,2762.69 ccw(c1190.54,2750.23) 1190.54,2737.77 1243.62,2737.77 cw(c1243.62,2725.31) 1243.62,2712.85 1190.54,2712.85 ccw(c1190.54,2700.38) 1190.54,2687.92 1240.54,2687.92 cw(c1240.54,2675.46) 1253,2675.46 1253,2673 1253,2613 1673,2193 1984.11,2193 1984.85,2192.26 2025.7,2192.26 2026.35,2192.91 2070.97,2192.91 v1(2087.11,2209.04)
DQ7: J1.18 U2.D16 | length 1752.4
  Layer 1 w5: U2.D16@2041.05,2194.56 v1(2055.29,2208.85)
  Layer 1 w7.7: J1.18@1318.83,2923 1318.91,2922.91 1318.91,2870.09 v1(1319,2870)
  Layer 3 w4.92: v1(1319,2870) 1310.48,2861.48 1301.27,2852.27 ccw(c1310.08,2843.46) 1310.08,2831 1339.33,2831 cw(c1339.33,2818.54) 1339.33,2806.08 1277.14,2806.08 ccw(c1277.14,2793.61) 1277.14,2781.15 1348,2781.15 cw(c1348,2768.69) 1348,2756.23 1277.21,2756.23 ccw(c1277.21,2743.77) 1277.21,2731.31 1348,2731.31 cw(c1348,2718.85) 1348,2706.38 1277.46,2706.38 ccw(c1277.46,2693.92) 1265,2693.92 1265,2666.54 1265,2640 1695.63,2209.37 1920.37,2209.37 1929.08,2218.08 1968.7,2218.08 1974.7,2224.08 2005.63,2224.08 2020.35,2209.37 2054.76,2209.37 v1(2055.29,2208.85)
DQ8: J1.21 U2.B15 | length 1544
  Layer 1 w5: U2.B15@1978.06,2163.02 1978.25,2163.02 1991.16,2175.93 v1(1991.36,2175.93)
  Layer 1 w7.7: v1(1354,2653) 1354.13,2652.87 1354.13,2600.3 J1.21@1354.26,2600.17